# Altium PCB pcb.PCBDOC (part 1 of 4)
Units mil, origin at the board's own origin, x right, y up, seen from the top; angles counter-clockwise.
Board outline 6250 x 3000 mil, 6 copper layers (Top Layer, Internal Plane 1, Mid-Layer 1, Mid-Layer 2, Internal Plane 2, Bottom Layer); 189 components, 357 nets, 1696 pads, 997 vias.
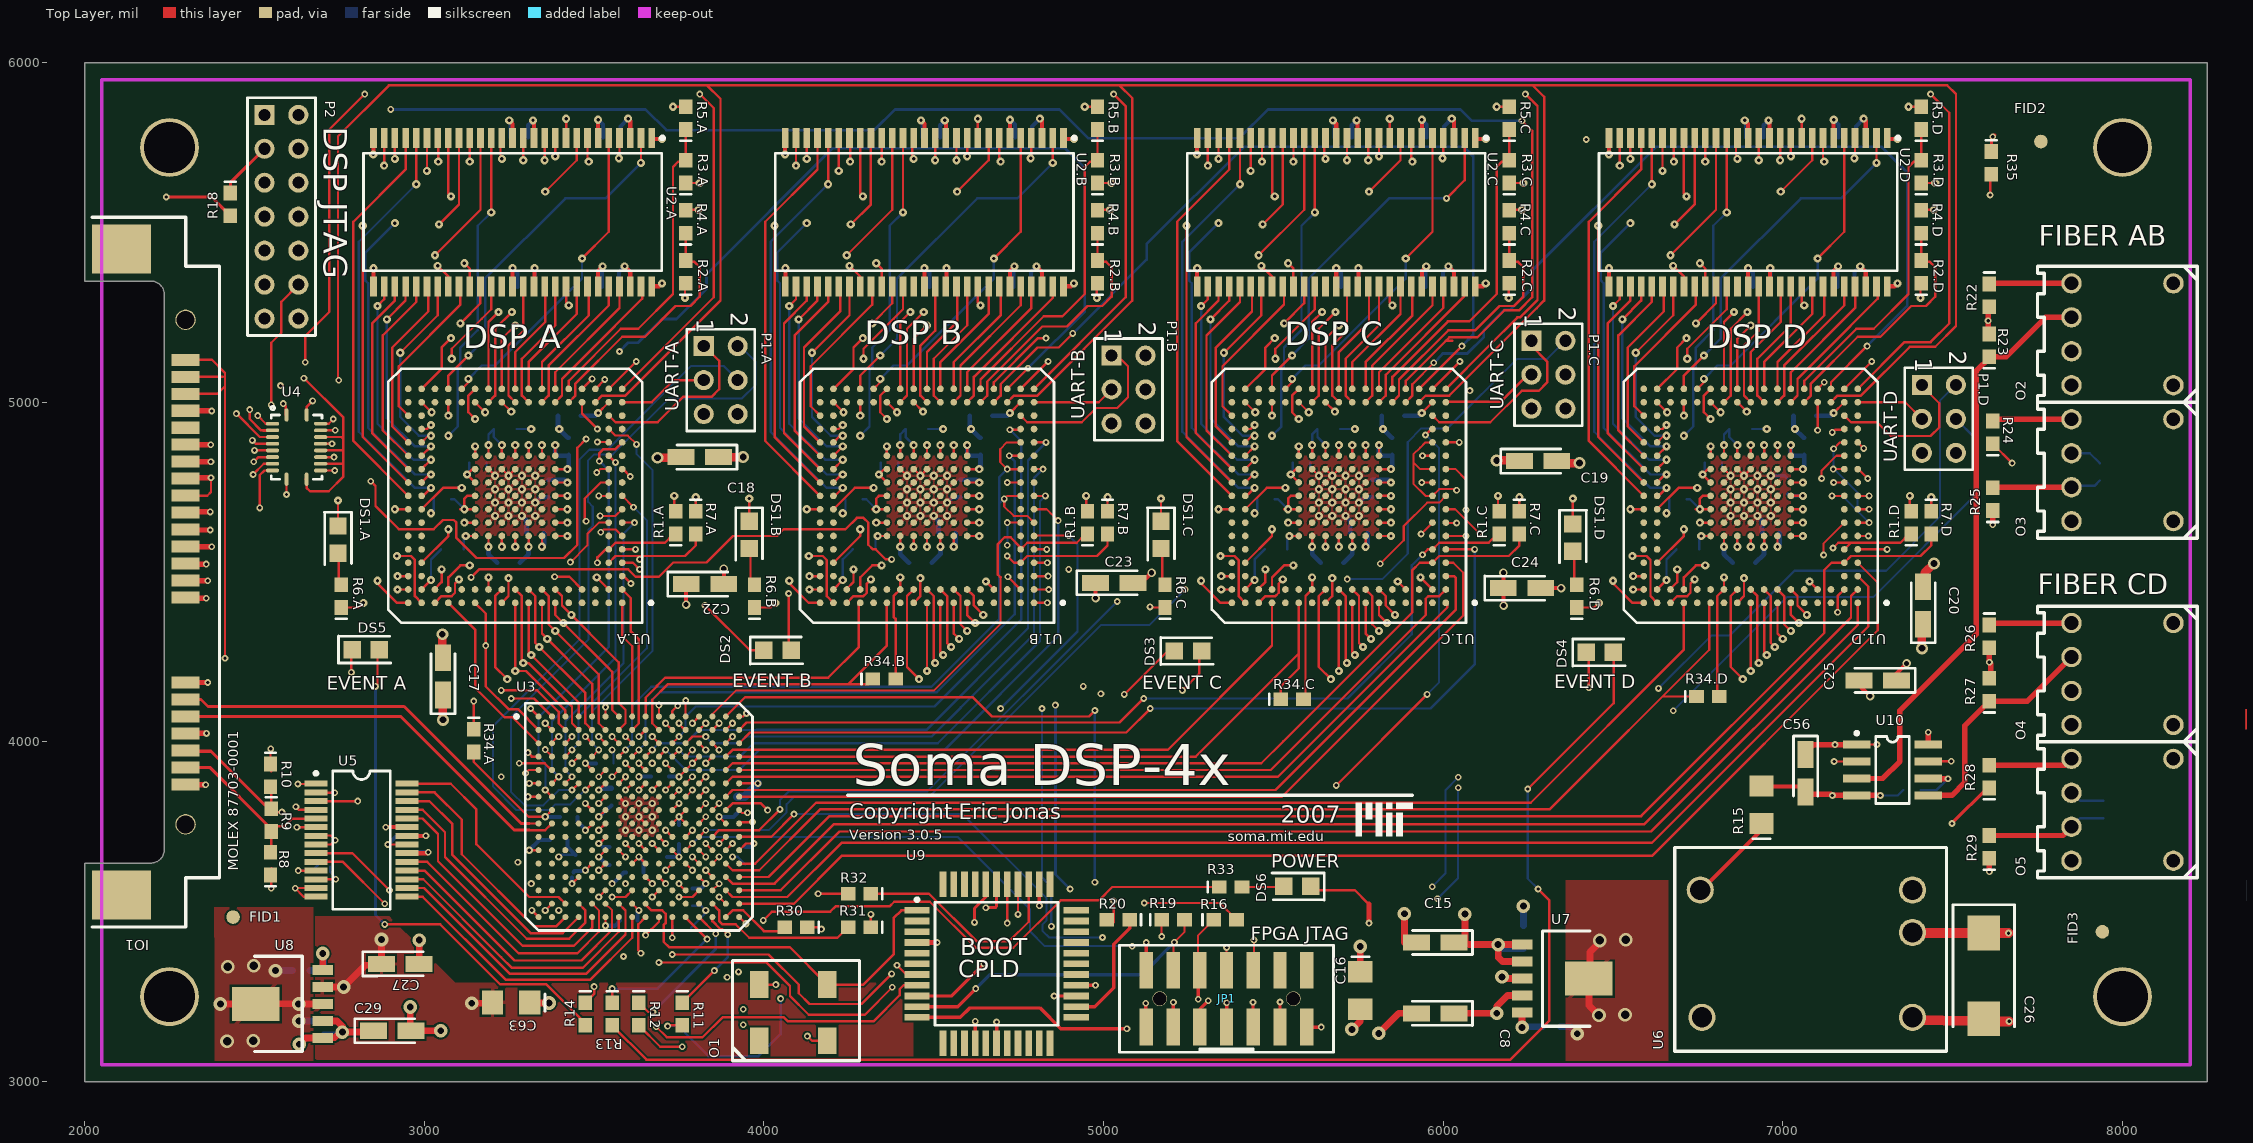
[diagram p0: Top Layer view]
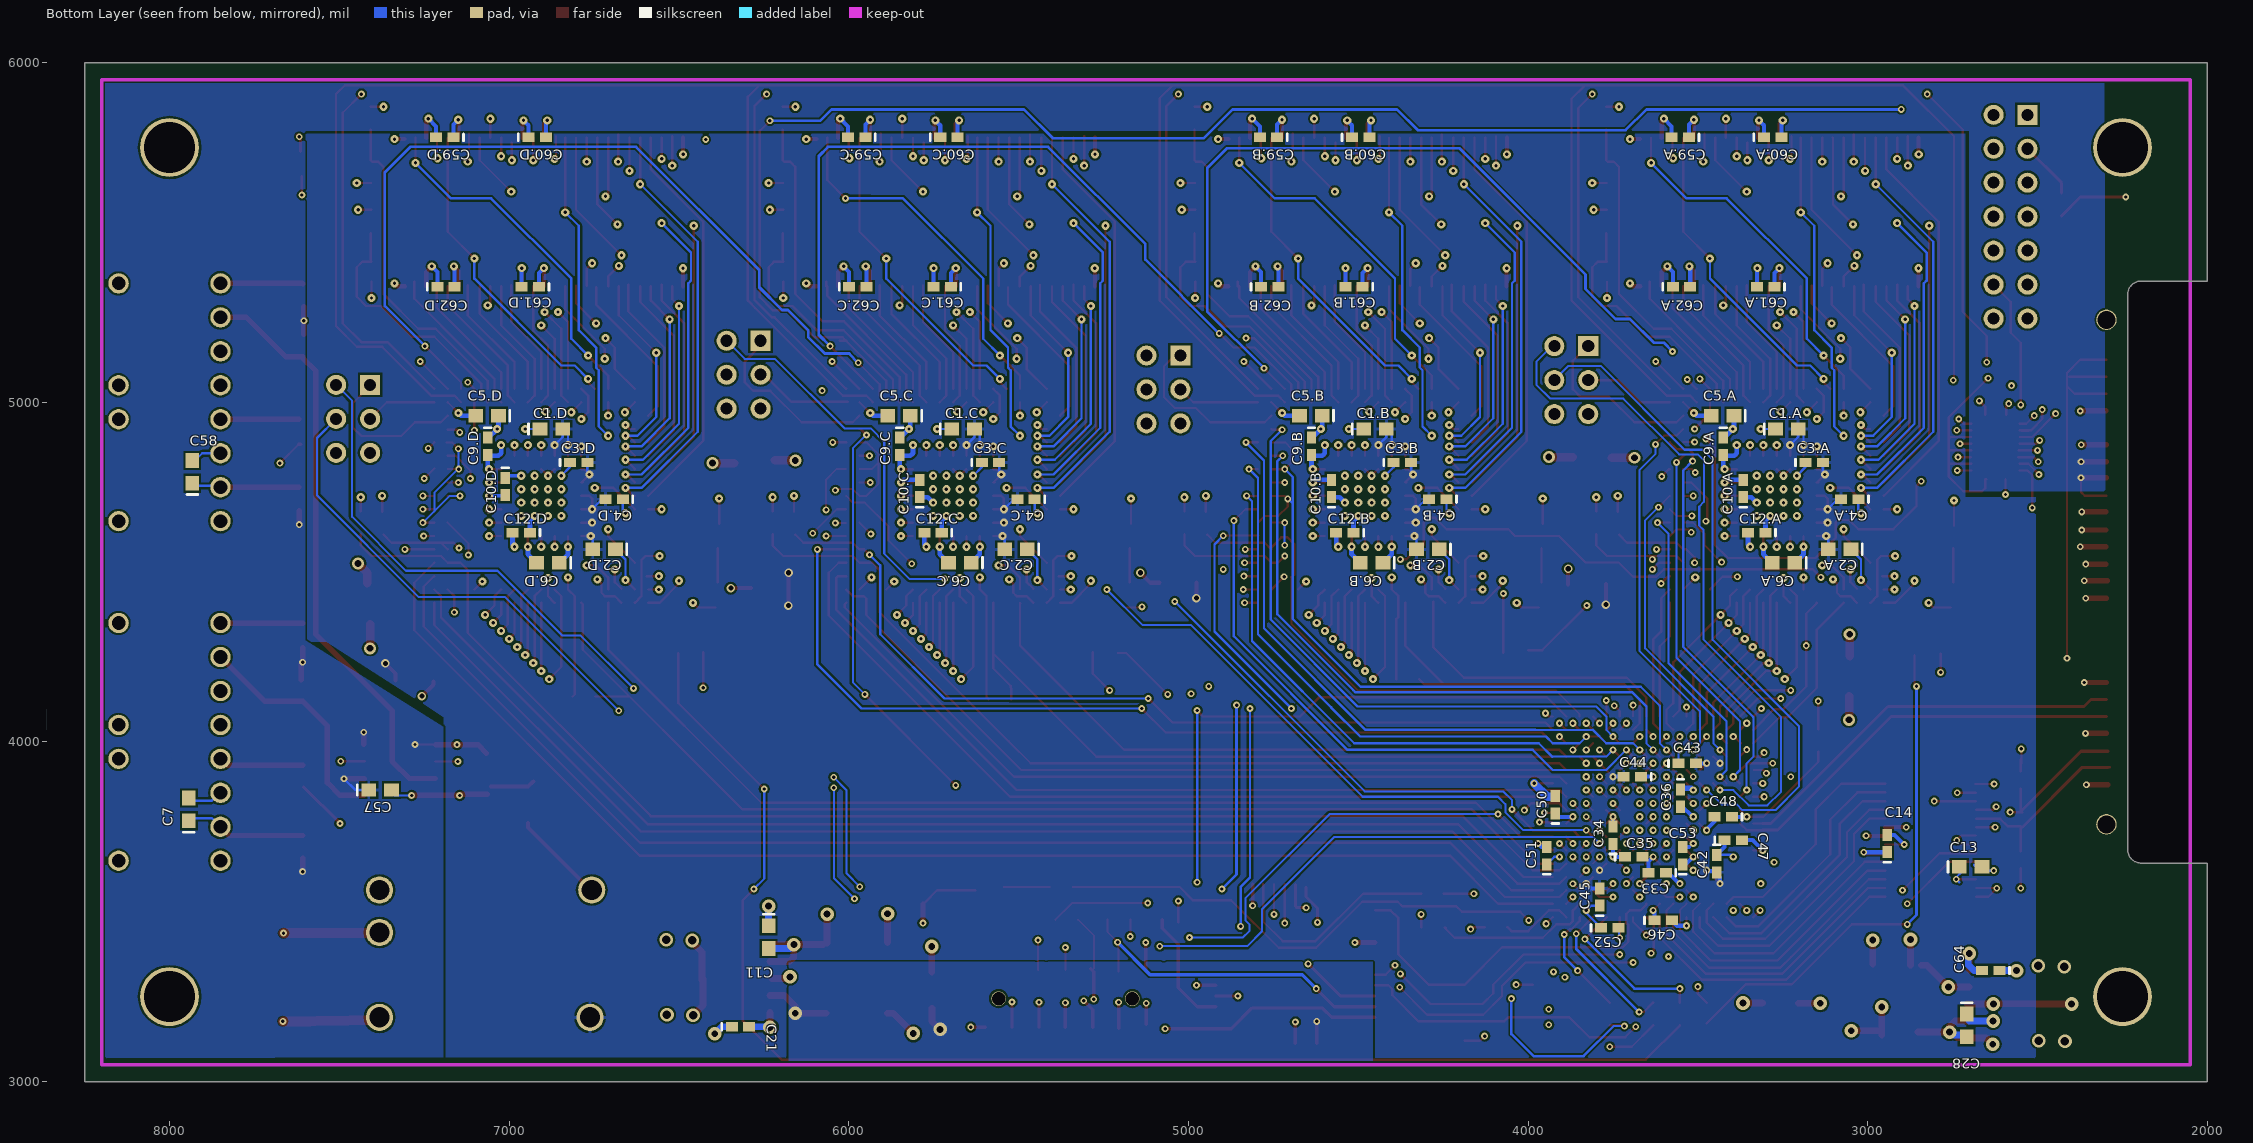
[diagram p1: Bottom Layer view, seen from below]
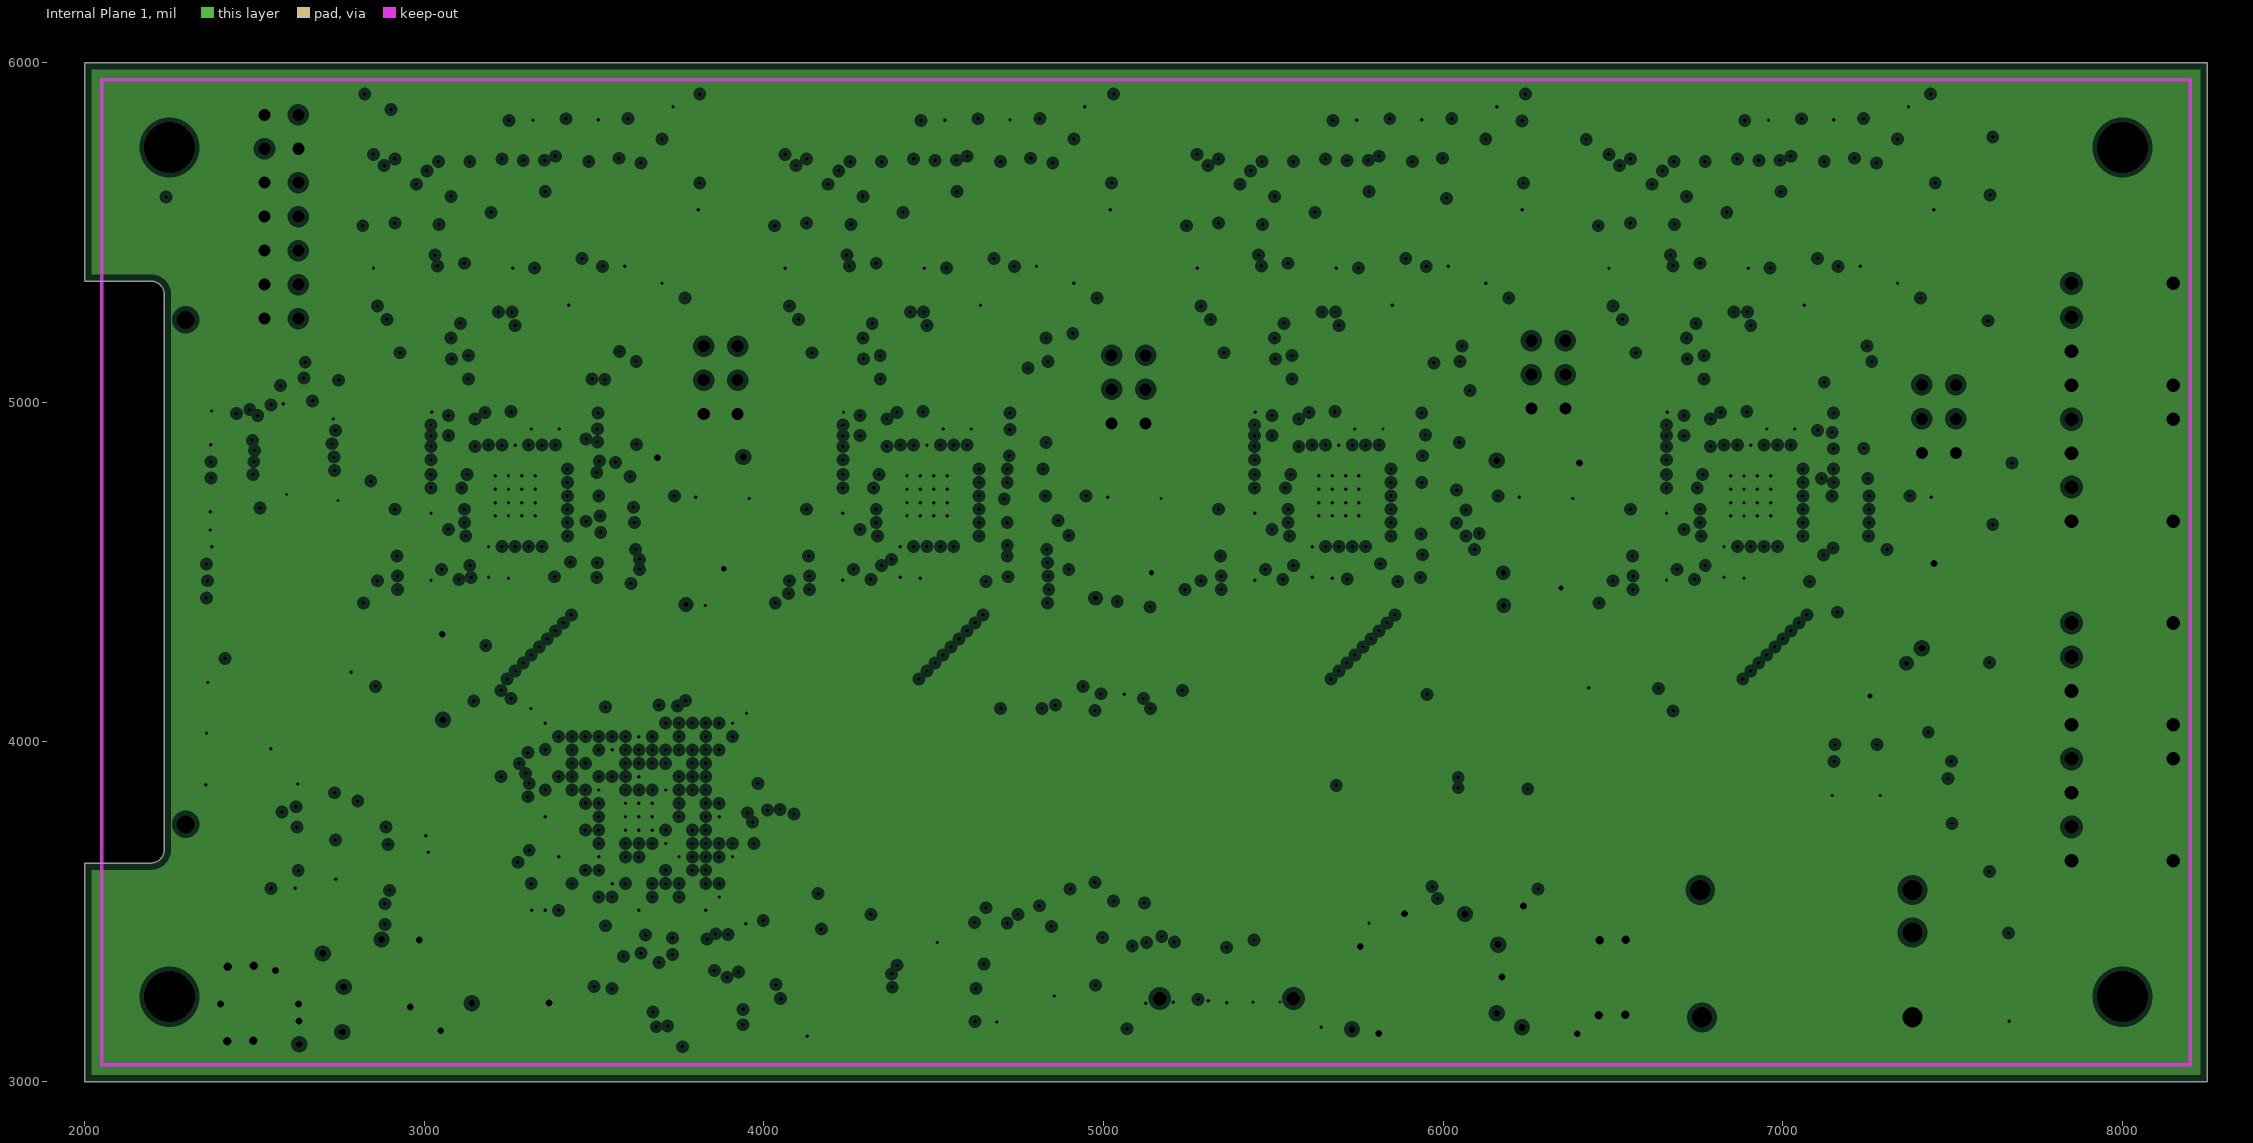
[diagram p2: Internal Plane 1, clearances drawn from the general rule]
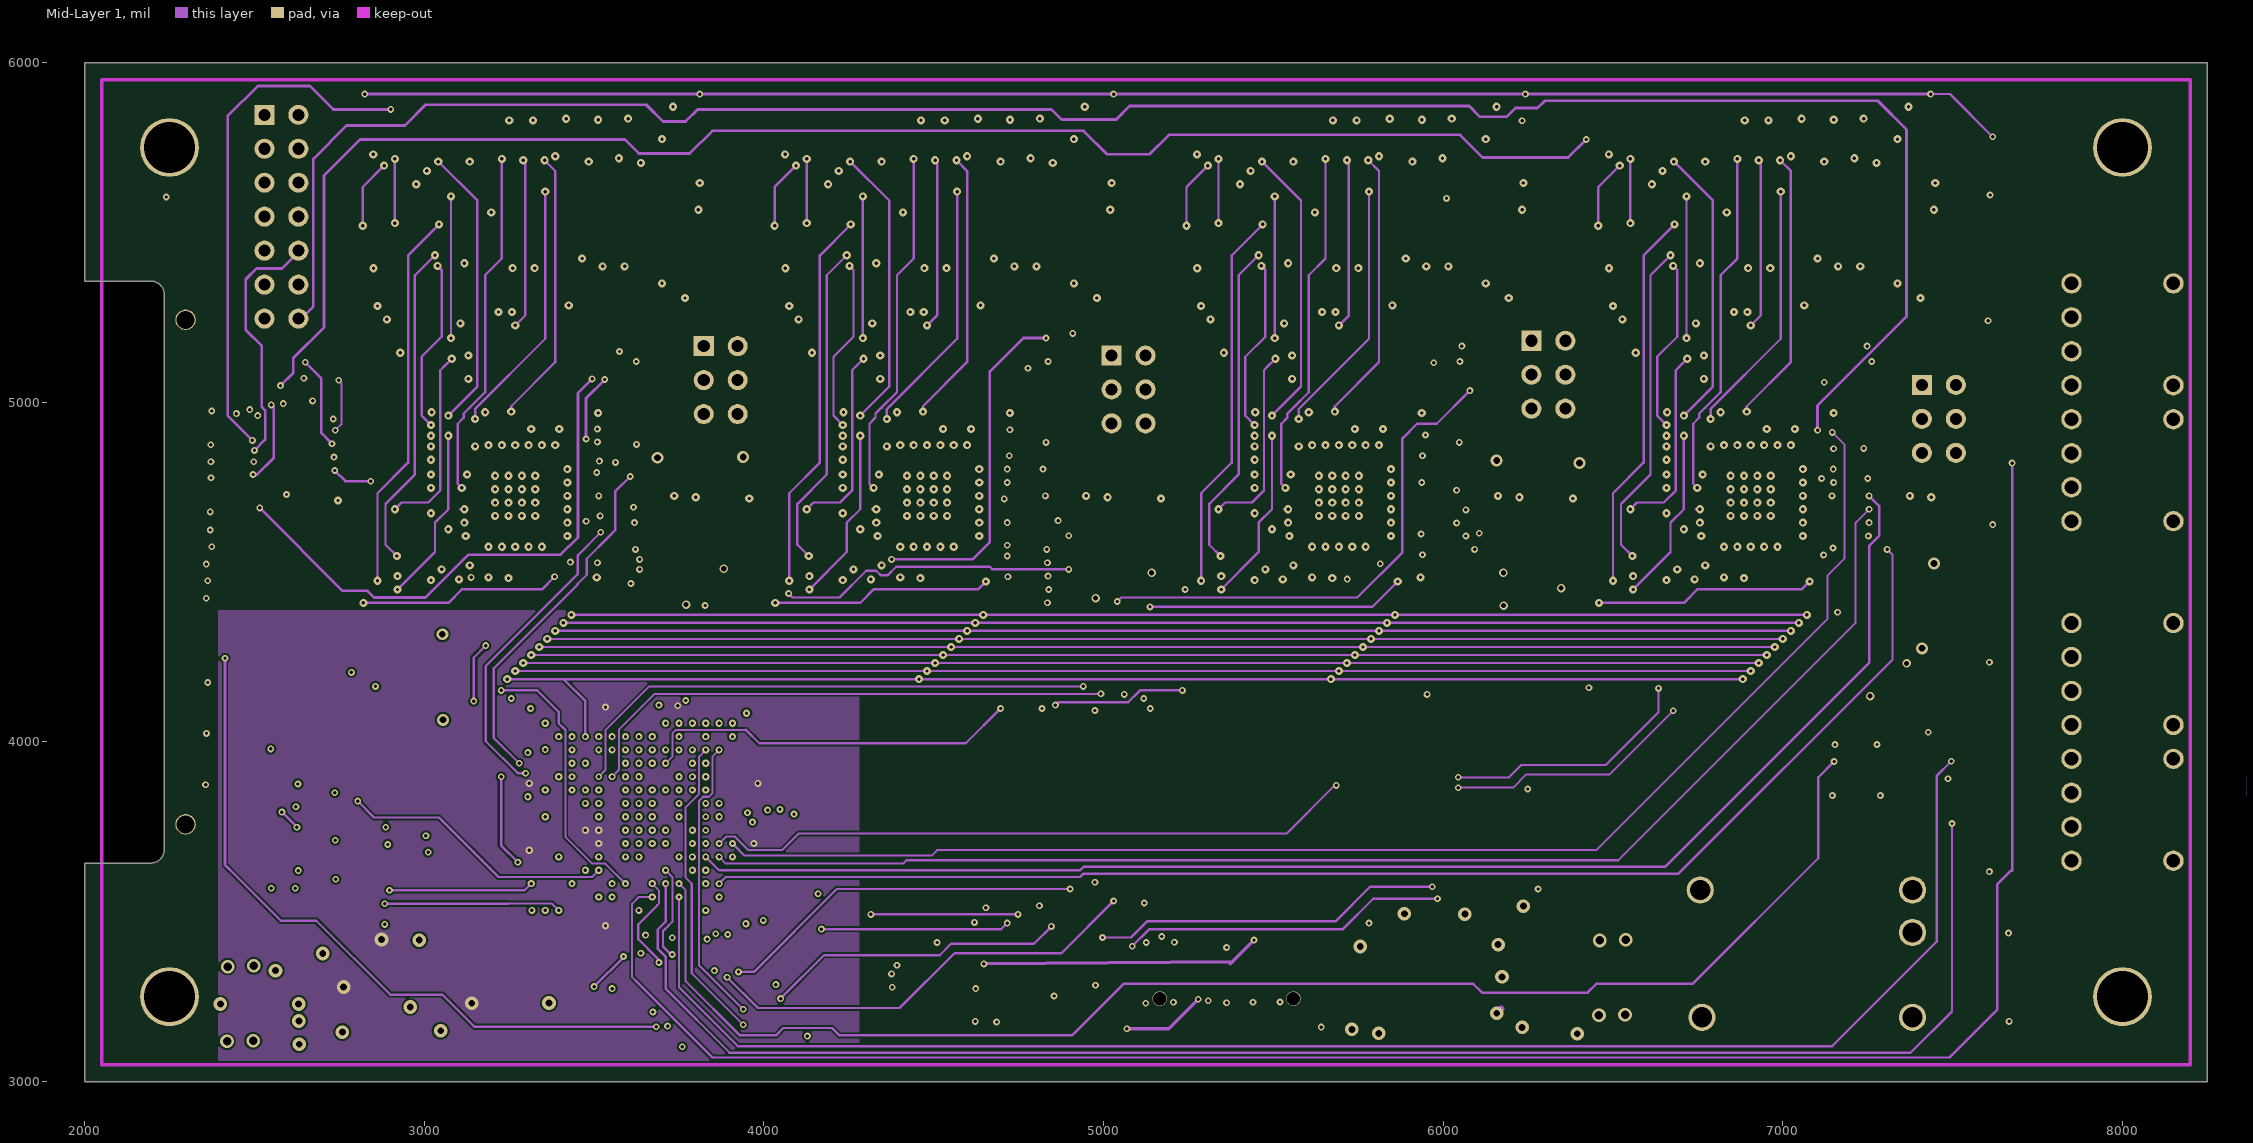
[diagram p3: Mid-Layer 1]
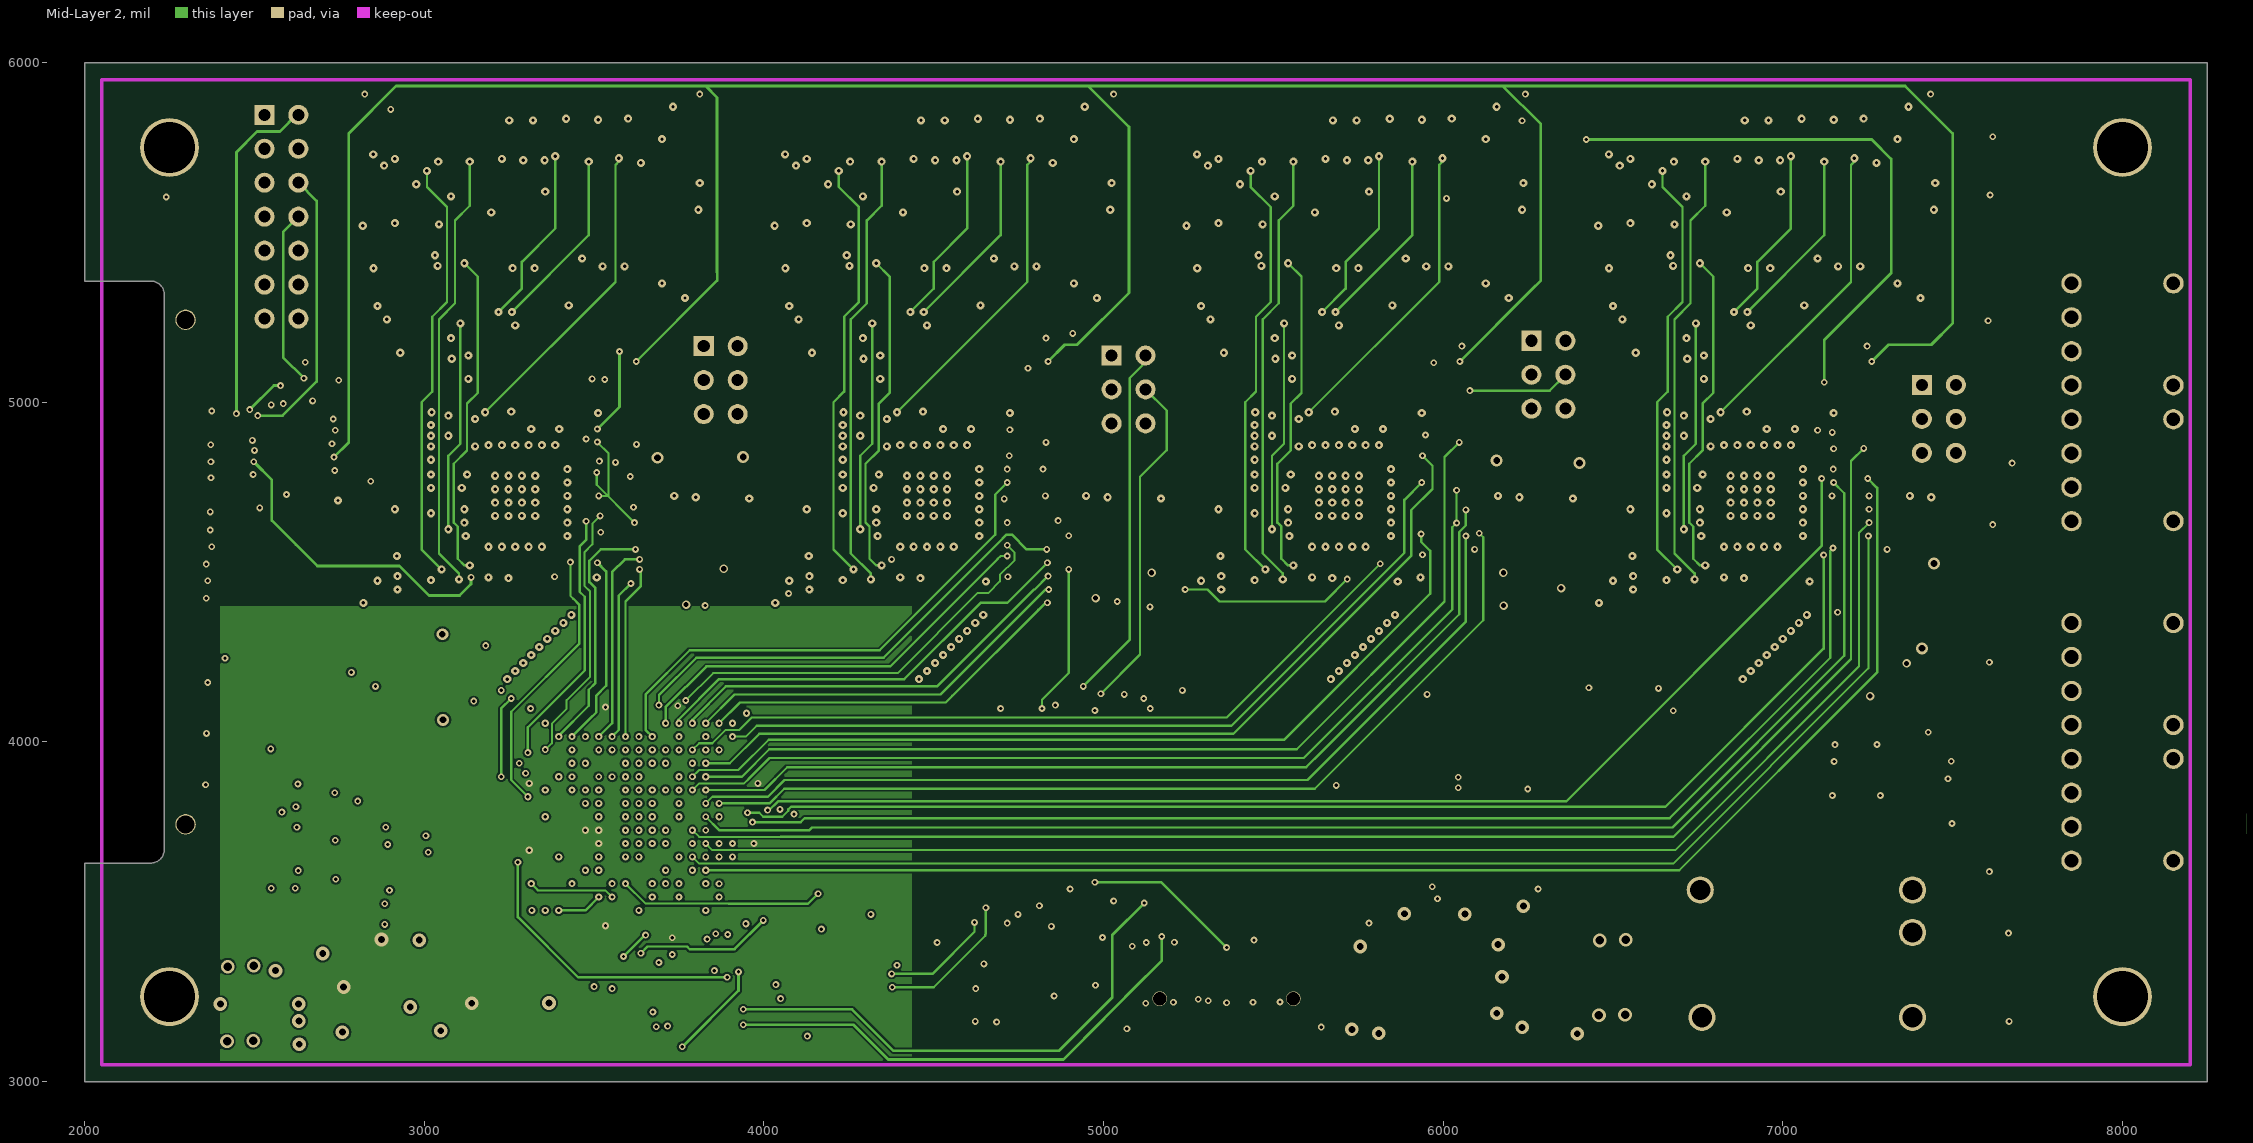
[diagram p4: Mid-Layer 2]
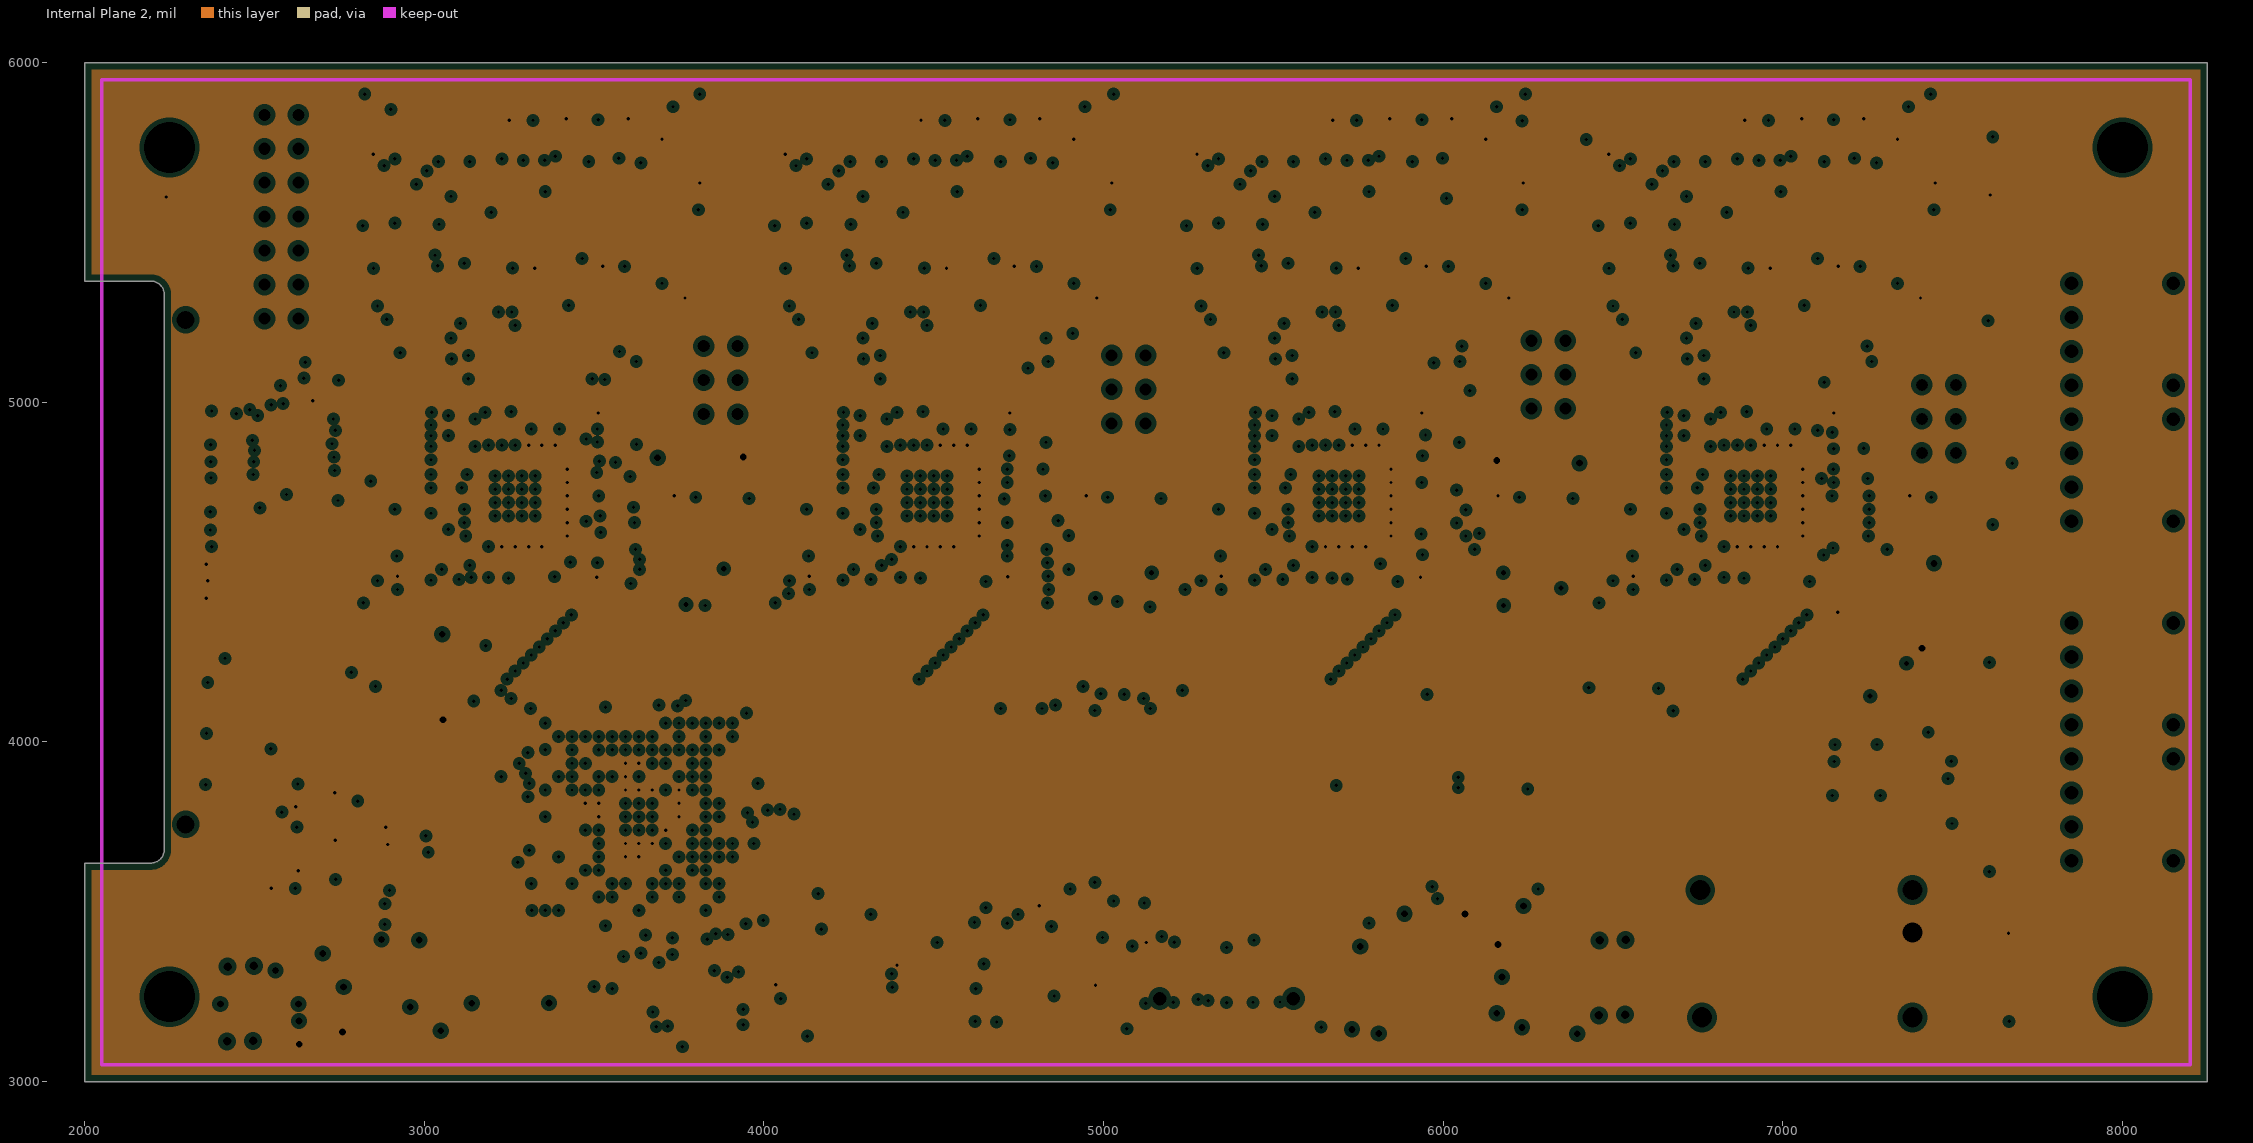
[diagram p5: Internal Plane 2, clearances drawn from the general rule]

## Layer stack, top to bottom
Top Layer: signal copper 1.4
Dielectric: core 12.6, FR-4, Dk 4.8
Internal Plane 1: plane copper 1.4, net GND
Dielectric: prepreg 12.6, FR-4, Dk 4.8
Mid-Layer 1: signal copper 1.4
Dielectric: core 12.6, FR-4, Dk 4.8
Mid-Layer 2: signal copper 1.4
Dielectric: prepreg 12.6, FR-4, Dk 4.8
Internal Plane 2: plane copper 1.4, net VCC
Dielectric: core 12.6, FR-4, Dk 4.8
Bottom Layer: signal copper 1.4

## Board outline
2000,3000 2000,3643.11 2194.88,3643.11 ccw(c2194.88,3682.48) 2234.25,3682.48 2234.25,5317.52 ccw(c2194.88,5317.52) 2194.88,5356.89 2000,5356.89 2000,6000 8250,6000 8250,3000

## Design rules (kind name [scope] priority, off if disabled: settings)
Clearance [All] p1: gap=6
ComponentClearance [All] p1: gap=10 collisioncheckmode=3 verticalgap=10
HoleSize [All] p1: absolutevalues=TRUE maxlimit=200 minlimit=1 maxpercent=80.000 minpercent=20.000
PlaneClearance [All] p1: clearance=14
PlaneConnect DSPGND_interface [(InNet('GND') AND (InComponentClass('A') OR InComponentClass('B') OR InComponentClass('C') OR
InComponentClass('D') ))] p1: planeconnectstyle=Relief reliefexpansion=15 reliefentries=4 reliefconductorwidth=15 reliefairgap=7
PlaneConnect [All] p2: planeconnectstyle=Relief reliefexpansion=14 reliefentries=4 reliefconductorwidth=10 reliefairgap=7
PolygonConnect [InNet('GND')] p1: connectstyle=Relief reliefconductorwidth=10 reliefentries=2 polygonreliefangle="45 Angle"
PolygonConnect PolygonConnect_1 [All] p2: connectstyle=Relief reliefconductorwidth=10 reliefentries=4 polygonreliefangle="90 Angle"
RoomDefinition main [InComponentClass('main')] p1: confinementstyle=ConfineIn formatcopy=TRUE lockcomponents=FALSE outline 8249.98,3076.77 7501.97,3076.77 7501.97,3342.51 8249.98,3342.51
RoomDefinition FIBER [InComponentClass('FIBER')] p2: confinementstyle=ConfineIn formatcopy=TRUE lockcomponents=FALSE outline 8249.98,5484.25 7547.24,5484.25 7547.24,3507.87 8249.98,3507.87
RoomDefinition D [InComponentClass('D')] p3: confinementstyle=ConfineIn formatcopy=TRUE lockcomponents=FALSE outline 6303.15,5897.64 7515.75,5897.64 7515.75,4169.29 6303.15,4169.29
RoomDefinition C [InComponentClass('C')] p4: confinementstyle=ConfineIn formatcopy=TRUE lockcomponents=FALSE outline 5090.55,5897.64 6303.15,5897.64 6303.15,4169.29 5090.55,4169.29
RoomDefinition B [InComponentClass('B')] p5: confinementstyle=ConfineIn formatcopy=TRUE lockcomponents=FALSE outline 3877.95,5897.64 5090.55,5897.64 5090.55,4169.29 3877.95,4169.29
RoomDefinition A [InComponentClass('A')] p6: confinementstyle=ConfineIn formatcopy=TRUE lockcomponents=FALSE outline 2665.35,5897.64 3877.95,5897.64 3877.95,4169.29 2665.35,4169.29
RoomDefinition FPGA [InComponentClass('FPGA')] p7: confinementstyle=ConfineIn formatcopy=TRUE lockcomponents=FALSE outline 8250,3005 3078.74,3005 3078.74,4010 8250,4010
RoomDefinition IO [InComponentClass('IO')] p8: confinementstyle=ConfineIn formatcopy=TRUE lockcomponents=FALSE outline 8250,3960 2340.55,3960 2340.55,3051.18 8250,3051.18
RoomDefinition PC [InComponentClass('PC')] p9: confinementstyle=ConfineIn formatcopy=TRUE lockcomponents=FALSE outline 4322.83,3023.62 7667.32,3023.62 7667.32,3824.8 4322.83,3824.8
RoutingVias [All] p1: holewidth=10 width=20 viastyle="Through Hole" minholewidth=10 minwidth=20 maxholewidth=28 maxwidth=50
SolderMaskExpansion [All] p1: expansion=4
TestPointUsage [All] p1: valid=0 allowmultiple=FALSE
Testpoint [All] p1: side=15 testpointundercomponent=TRUE minsize=40 maxsize=100 preferedsize=60 minholesize=0 maxholesize=40 preferedholesize=32 testpointgrid=1 style=1023 order=0-112345678
Width [All] p1: maxlimit=50 minlimit=6 preferedwidth=8 toplayer_prefwidth=7 midlayer1_prefwidth=7 midlayer2_prefwidth=7 bottomlayer_prefwidth=6 minimp=50.000000 maximp=50.000000 favimp=50.000000
14 further rules are at their usual default settings.

## Classes and differential pairs
component class FIBER: C7 C56 C57 C58 O2 O3 O4 O5 R22 R23 R24 R25 R26 R27 R28 R29 U10
component class B: C1.B C2.B C3.B C4.B C5.B C6.B C9.B C10.B C12.B C59.B C60.B C61.B C62.B DS1.B P1.B R1.B R2.B R3.B R4.B R5.B R6.B R7.B R34.B U1.B U2.B
component class D: C1.D C2.D C3.D C4.D C5.D C6.D C9.D C10.D C12.D C59.D C60.D C61.D C62.D DS1.D P1.D R1.D R2.D R3.D R4.D R5.D R6.D R7.D R34.D U1.D U2.D
component class C: C1.C C2.C C3.C C4.C C5.C C6.C C9.C C10.C C12.C C59.C C60.C C61.C C62.C DS1.C P1.C R1.C R2.C R3.C R4.C R5.C R6.C R7.C R34.C U1.C U2.C
component class A: C1.A C2.A C3.A C4.A C5.A C6.A C7.DSPA C8.DSPA C9.A C10.A C11.DSPA C12.A C59.A C60.A C61.A C62.A DS1.A P1.A R1.A R2.A R3.A R4.A R5.A R6.A R7.A R34.A U1.A U2.A
component class FPGA: P2 R18 R35 U4
net class PPI[0..7]: PPI0 PPI1 PPI2 PPI3 PPI4 PPI5 PPI6 PPI7
channel class DSP: A B C D
component class IO: C13 C14 DS2 DS3 DS4 DS5 DS6 IO1 R8 R9 R10 R11 R12 R13 R14 R33 U5
component class PC: C8 C11 C15 C16 C17 C18 C19 C20 C21 C22 C23 C24 C25 C26 C27 C28 C29 C30 C31 C32 C33 C34 C35 C36 C37 C38 C39 C40 C41 C42 C43 C44 C45 C46 C47 C48 C49 C50 C51 C52 C53 C54 C55 C63 C64 JP1 O1 R15 R16 R17 R19 R20 R30 R31 R32 U3 U6 U7 U8 U9
component class main: FID1 FID2 FID3

## Components (designator, comment, footprint, x,y, rotation, side; value= is the part's Value field where it differs from the comment)
C1.A "CAPACITOR" 0603 3238.19,4921.26 r180 bottom (schematic designator C1)
C1.B "CAPACITOR" 0603 4450.79,4921.26 r180 bottom (schematic designator C1)
C1.C "CAPACITOR" 0603 5663.39,4921.26 r180 bottom (schematic designator C1)
C1.D "CAPACITOR" 0603 6875.98,4921.26 r180 bottom (schematic designator C1)
C2.A "CAPACITOR" 0603 3082.61,4566.93 r0 bottom (schematic designator C2)
C2.B "CAPACITOR" 0603 4295.21,4566.93 r0 bottom (schematic designator C2)
C2.C "CAPACITOR" 0603 5507.81,4566.93 r0 bottom (schematic designator C2)
C2.D "CAPACITOR" 0603 6720.41,4566.93 r0 bottom (schematic designator C2)
C3.A "CAPACITOR" 0402 3157.54,4822.83 r180 bottom (schematic designator C3)
C3.B "CAPACITOR" 0402 4370.14,4822.83 r180 bottom (schematic designator C3)
C3.C "CAPACITOR" 0402 5582.74,4822.83 r180 bottom (schematic designator C3)
C3.D "CAPACITOR" 0402 6795.34,4822.83 r180 bottom (schematic designator C3)
C4.A "CAPACITOR" 0402 3053.09,4714.57 r0 bottom (schematic designator C4)
C4.B "CAPACITOR" 0402 4265.69,4714.57 r0 bottom (schematic designator C4)
C4.C "CAPACITOR" 0402 5478.28,4714.57 r0 bottom (schematic designator C4)
C4.D "CAPACITOR" 0402 6690.88,4714.57 r0 bottom (schematic designator C4)
C5.A "CAPACITOR" 0603 3427.1,4960.63 r0 bottom (schematic designator C5)
C5.B "CAPACITOR" 0603 4639.7,4960.63 r0 bottom (schematic designator C5)
C5.C "CAPACITOR" 0603 5852.3,4960.63 r0 bottom (schematic designator C5)
C5.D "CAPACITOR" 0603 7064.9,4960.63 r0 bottom (schematic designator C5)
C6.A "CAPACITOR" 0603 3248.03,4527.56 r0 bottom (schematic designator C6)
C6.B "CAPACITOR" 0603 4460.63,4527.56 r0 bottom (schematic designator C6)
C6.C "CAPACITOR" 0603 5673.23,4527.56 r0 bottom (schematic designator C6)
C6.D "CAPACITOR" 0603 6885.83,4527.56 r0 bottom (schematic designator C6)
C7 "CAPACITOR" 0603 7942.91,3801.12 r90 bottom
C8 "POLCAP" 3216 5976.38,3200.79 r180 top
C9.A "CAPACITOR" 0402 3425.2,4870.14 r270 bottom (schematic designator C9)
C9.B "CAPACITOR" 0402 4637.8,4870.14 r270 bottom (schematic designator C9)
C9.C "CAPACITOR" 0402 5850.39,4870.14 r270 bottom (schematic designator C9)
C9.D "CAPACITOR" 0402 7062.99,4870.14 r270 bottom (schematic designator C9)
C10.A "CAPACITOR" 0402 3366.14,4746 r90 bottom (schematic designator C10)
C10.B "CAPACITOR" 0402 4578.74,4746 r90 bottom (schematic designator C10)
C10.C "CAPACITOR" 0402 5791.34,4746 r90 bottom (schematic designator C10)
C10.D "CAPACITOR" 0402 7011.81,4751.97 r270 bottom (schematic designator C10)
C11 "CAPACITOR" 0603 6236.22,3425.2 r270 bottom
C12.A "CAPACITOR" 0402 3326.77,4616.14 r0 bottom (schematic designator C12)
C12.B "CAPACITOR" 0402 4539.37,4616.14 r0 bottom (schematic designator C12)
C12.C "CAPACITOR" 0402 5751.97,4616.14 r0 bottom (schematic designator C12)
C12.D "CAPACITOR" 0402 6964.57,4616.14 r0 bottom (schematic designator C12)
C13 "CAPACITOR" 0603 2696.85,3631.89 r180 bottom
C14 "CAPACITOR" 0402 2942.91,3700.79 r90 bottom
C15 "POLCAP" 3216 5976.38,3409.45 r180 top
C16 "Cap" 1206 5755.91,3267.72 r270 top
C17 "Bypass Cap" 3216 3055.12,4192.91 r90 top
C18 "Bypass Cap" 3216 3811.02,4838.58 r180 top
C19 "Bypass Cap" 3216 6279.53,4826.77 r0 top
C20 "Bypass Cap" 3216 7413.39,4401.57 r90 top
C21 "CAPACITOR" 0402 6318.9,3161.42 r180 bottom
C22 "Bypass Cap" 3216 3826.77,4464.57 r0 top
C23 "Bypass Cap" 3216 5031.5,4468.5 r0 top
C24 "Bypass Cap" 3216 6232.28,4452.76 r0 top
C25 "Bypass Cap" 3216 7279.53,4181.1 r180 top
C26 "A700D107M006AT" 7343 7591.54,3311.02 r270 top
C27 "POLCAP" 3216 2929.13,3346.46 r0 top
C28 "CAPACITOR" 0603 2708.66,3165.35 r270 bottom
C29 "POLCAP" 3216 2905.51,3149.61 r0 top
C33 "CAPACITOR" 0402 3620,3615 r0 bottom
C34 "CAPACITOR" 0402 3750,3725 r90 bottom
C35 "CAPACITOR" 0402 3688.98,3661.42 r180 bottom
C36 "CAPACITOR" 0402 3551.18,3834.65 r270 bottom
C42 "CAPACITOR" 0402 3444.88,3641.73 r270 bottom
C43 "CAPACITOR" 0402 3531.5,3937.01 r180 bottom
C44 "CAPACITOR" 0402 3692.91,3897.64 r0 bottom
C45 "CAPACITOR" 0402 3789.37,3543.31 r90 bottom
C46 "CAPACITOR" 0402 3602.36,3474.41 r180 bottom
C47 "CAPACITOR" 0402 3395.67,3710.63 r180 bottom
C48 "CAPACITOR" 0402 3425.2,3779.53 r0 bottom
C50 "CAPACITOR" 0402 3920,3815 r90 bottom
C51 "CAPACITOR" 0402 3945,3665 r90 bottom
C52 "CAPACITOR" 0402 3759.84,3452.76 r180 bottom
C53 "CAPACITOR" 0402 3545,3665 r90 bottom
C56 "Bypass Cap" 3216 7066.93,3907.48 r270 top
C57 "CAPACITOR" 0603 7379.98,3858.27 r180 bottom
C58 "CAPACITOR" 0603 7933.07,4795.21 r90 bottom
C59.A "CAPACITOR" 0402 3551.75,5780 r0 bottom (schematic designator C59)
C59.B "CAPACITOR" 0402 4764.35,5780 r0 bottom (schematic designator C59)
C59.C "CAPACITOR" 0402 5976.95,5780 r0 bottom (schematic designator C59)
C59.D "CAPACITOR" 0402 7189.54,5780 r0 bottom (schematic designator C59)
C60.A "CAPACITOR" 0402 3280,5780 r180 bottom (schematic designator C60)
C60.B "CAPACITOR" 0402 4492.6,5780 r180 bottom (schematic designator C60)
C60.C "CAPACITOR" 0402 5705.2,5780 r180 bottom (schematic designator C60)
C60.D "CAPACITOR" 0402 6917.8,5780 r180 bottom (schematic designator C60)
C61.A "CAPACITOR" 0402 3300,5340 r0 bottom (schematic designator C61)
C61.B "CAPACITOR" 0402 4512.6,5340 r0 bottom (schematic designator C61)
C61.C "CAPACITOR" 0402 5725.2,5340 r0 bottom (schematic designator C61)
C61.D "CAPACITOR" 0402 6937.8,5340 r0 bottom (schematic designator C61)
C62.A "CAPACITOR" 0402 3548.25,5340 r180 bottom (schematic designator C62)
C62.B "CAPACITOR" 0402 4760.85,5340 r180 bottom (schematic designator C62)
C62.C "CAPACITOR" 0402 5973.45,5340 r180 bottom (schematic designator C62)
C62.D "CAPACITOR" 0402 7186.05,5340 r180 bottom (schematic designator C62)
C63 "Cap" 1206 3255.91,3232.28 r180 top
C64 "CAPACITOR" 0402 2637.73,3326.77 r0 bottom
DS1.A "LED3" LED0805 2746.06,4635.83 r270 top (schematic designator DS1)
DS1.B "LED3" LED0805 3956.69,4649.61 r270 top (schematic designator DS1)
DS1.C "LED3" LED0805 5169.29,4649.61 r270 top (schematic designator DS1)
DS1.D "LED3" LED0805 6381.89,4641.73 r270 top (schematic designator DS1)
DS2 "LED3" LED0805 4000,4269.69 r0 top
DS3 "LED3" LED0805 5208.66,4267.72 r0 top
DS4 "LED3" LED0805 6421.26,4263.78 r0 top
DS5 "LED3" LED0805 2787.4,4271.65 r0 top
DS6 "LED3" LED0805 5610.24,3574.8 r180 top
FID1 "*" FIDUCIAL 2437.01,3484.25 r90 top
FID2 "*" FIDUCIAL 7759.84,5767.72 r90 top
FID3 "*" FIDUCIAL 7940.94,3440.94 r90 top
IO1 "SATA 23-pin header" "MOLEX 87703-0001" 2297.24,4500 r270 top locked
JP1 "Header 7X2" "SMT 2x7 2mm HDR" 5362.2,3244.09 r180 top
O1 "OSC2" ECS-3953M 3986.22,3120.08 r0 top
O2 "HFBR-1528" HPVL 7850,5200 r90 top locked
O3 "HFBR-2528" HPVL 7850,4800 r90 top locked
O4 "HFBR-1528" HPVL 7850,4200 r90 top
O5 "HFBR-2528" HPVL 7850,3800 r90 top
P1.A "Header 3X2" HDR2X3 3822.83,5165.35 r270 top (schematic designator P1)
P1.B "Header 3X2" HDR2X3 5023.62,5137.8 r270 top (schematic designator P1)
P1.C "Header 3X2" HDR2X3 6259.84,5181.1 r270 top (schematic designator P1)
P1.D "Header 3X2" HDR2X3 7409.45,5051.18 r270 top (schematic designator P1)
P2 "Header 7X2" HDR2X7 2529.53,5846.46 r270 top
R1.A "RESISTOR" 0603 3740.16,4645.67 r90 top (schematic designator R1)
R1.B "RESISTOR" 0603 4952.76,4645.67 r90 top (schematic designator R1)
R1.C "RESISTOR" 0603 6165.35,4645.67 r90 top (schematic designator R1)
R1.D "RESISTOR" 0603 7377.95,4645.67 r90 top (schematic designator R1)
R2.A "RESISTOR" 0603 3769.68,5383.86 r90 top (schematic designator R2)
R2.B "RESISTOR" 0603 4982.28,5383.86 r90 top (schematic designator R2)
R2.C "RESISTOR" 0603 6194.88,5383.86 r90 top (schematic designator R2)
R2.D "RESISTOR" 0603 7407.48,5383.86 r90 top (schematic designator R2)
R3.A "RESISTOR" 0603 3769.68,5679.13 r90 top (schematic designator R3)
R3.B "RESISTOR" 0603 4982.28,5679.13 r90 top (schematic designator R3)
R3.C "RESISTOR" 0603 6194.88,5679.13 r90 top (schematic designator R3)
R3.D "RESISTOR" 0603 7407.48,5679.13 r90 top (schematic designator R3)
R4.A "RESISTOR" 0603 3769.68,5531.5 r90 top (schematic designator R4)
R4.B "RESISTOR" 0603 4982.28,5531.5 r90 top (schematic designator R4)
R4.C "RESISTOR" 0603 6194.88,5531.5 r90 top (schematic designator R4)
R4.D "RESISTOR" 0603 7407.48,5531.5 r90 top (schematic designator R4)
R5.A "RESISTOR" 0603 3769.68,5836.61 r90 top (schematic designator R5)
R5.B "RESISTOR" 0603 4982.28,5836.61 r90 top (schematic designator R5)
R5.C "RESISTOR" 0603 6194.88,5836.61 r90 top (schematic designator R5)
R5.D "RESISTOR" 0603 7407.48,5836.61 r90 top (schematic designator R5)
R6.A "RESISTOR" 0603 2755.91,4429.13 r90 top (schematic designator R6)
R6.B "RESISTOR" 0603 3972.44,4429.13 r90 top (schematic designator R6)
R6.C "RESISTOR" 0603 5181.1,4429.13 r90 top (schematic designator R6)
R6.D "RESISTOR" 0603 6393.7,4429.13 r90 top (schematic designator R6)
R7.A "RESISTOR" 0603 3799.21,4645.67 r270 top (schematic designator R7)
R7.B "RESISTOR" 0603 5011.81,4645.67 r270 top (schematic designator R7)
R7.C "RESISTOR" 0603 6224.41,4645.67 r270 top (schematic designator R7)
R7.D "RESISTOR" 0603 7437.01,4645.67 r270 top (schematic designator R7)
R8 "100" 0603 2547.24,3641.73 r90 top
R9 "100" 0603 2549.21,3769.68 r270 top
R10 "100" 0603 2547.24,3901.57 r270 top
R11 "RESISTOR" 0603 3759.84,3198.82 r270 top
R12 "RESISTOR" 0603 3631.89,3198.82 r270 top
R13 "RESISTOR" 0603 3553.15,3198.82 r270 top
R14 "RESISTOR" 0603 3474.41,3198.82 r270 top
R15 "RESISTOR" 1206 6937.01,3814.96 r90 top
R16 "current-limiting series res" 0603 5358.27,3476.38 r0 top
R18 "RESISTOR" 0603 2429.13,5582.68 r270 top
R19 "current-limiting series res" 0603 5204.72,3476.38 r0 top
R20 "current-limiting series res" 0603 5043.31,3476.38 r180 top
R22 "RESISTOR" 0603 7608.27,5314.96 r270 top
R23 "RESISTOR" 0603 7608.27,5167.32 r90 top
R24 "RESISTOR" 0603 7618.11,4911.42 r90 top
R25 "RESISTOR" 0603 7618.11,4714.57 r90 top
R26 "RESISTOR" 0603 7608.27,4311.02 r270 top
R27 "RESISTOR" 0603 7608.27,4153.54 r90 top
R28 "RESISTOR" 0603 7608.27,3897.64 r90 top
R29 "RESISTOR" 0603 7608.27,3690.94 r90 top
R30 "current-limiting series res" 0603 4094.49,3454.72 r180 top
R31 "current-limiting series res" 0603 4281.5,3454.72 r180 top
R32 "current-limiting series res" 0603 4281.5,3553.15 r180 top
R33 "RESISTOR" 0603 5374.02,3572.83 r0 top
R34.A "RESISTOR" 0603 3145.67,4003.94 r270 top (schematic designator R34)
R34.B "RESISTOR" 0603 4354.33,4185.04 r0 top (schematic designator R34)
R34.C "RESISTOR" 0603 5555.12,4125.98 r0 top (schematic designator R34)
R34.D "RESISTOR" 0603 6779.53,4133.86 r0 top (schematic designator R34)
R35 "RESISTOR" 0603 7614.17,5704.72 r270 top
U1.A "Blackfin BF533-PGBA169" "AD PBGA-169" 3267.72,4724.41 r180 top locked (schematic designator U1)
U1.B "Blackfin BF533-PGBA169" "AD PBGA-169" 4480.31,4724.41 r180 top (schematic designator U1)
U1.C "Blackfin BF533-PGBA169" "AD PBGA-169" 5692.91,4724.41 r180 top (schematic designator U1)
U1.D "Blackfin BF533-PGBA169" "AD PBGA-169" 6905.51,4724.41 r180 top locked (schematic designator U1)
U2.A "16Mx16 SDRAM" SO-G54/X.5 3260,5560 r180 top (schematic designator U2)
U2.B "16Mx16 SDRAM" SO-G54/X.5 4472.6,5560 r180 top (schematic designator U2)
U2.C "16Mx16 SDRAM" SO-G54/X.5 5685.2,5560 r180 top (schematic designator U2)
U2.D "16Mx16 SDRAM" SO-G54/X.5 6897.8,5560 r180 top (schematic designator U2)
U3 "Xilinx XC3S200-FT256" "XILINX FT256 BGA" 3631.89,3779.53 r0 top locked
U4 "SN54LVTH244A" RGY 2624.02,4868.11 r270 top
U5 "DS92LV1224" SSO-G28/E4.3 2814.96,3710.63 r270 top
U6 "PTH03000WAH" "TI EUS" 7381.89,3188.98 r180 top
U7 "TPS79518" SOT223-5/Simple 6232.28,3303.15 r270 top
U8 "TPS79525" SOT223-5/Simple 2700.79,3228.35 r90 top
U9 "Xilinx CoolRunner-II XC2C64A" QFP10x10-G44/G10N 4685.04,3346.46 r0 top
U10 "SN75451BD" SO-G8/E2.5 7322.83,3917.32 r270 top

## Footprints (in the part's own frame and the unit in brackets; to place one, negate y for a bottom-side part, rotate by r counter-clockwise, add the part's x,y. Pads: shape width x height; smd on the part's side, far side on the other; paste and mask are expansions set on the pad)
0402 [mm] "Standard-sized 0402 Passive"
  rect 0.9x0.7 smd: 1(-0.65,0) 2(0.65,0)
  silkscreen extent -1.4,-0.25 -1.4,0.25
0603 [mm] "Standard-sized 0603 Passive"
  rect 1.1x1 smd: 1(-0.85,0) 2(0.85,0)
  silkscreen extent -1.7,-0.4 -1.7,0.4
1206 [mm] "Standard-sized 1206 Passive"
  rect 1.6x1.8 smd: 1(-1.4,0) 2(1.4,0)
  silkscreen extent -2.53,-0.65 -2.53,0.65
3216 [mm] "Standard-Sized 3216 Polarized Leadless Cap"
  rect 2x1.2 smd: 1(-1.4,0) 2(1.4,0)
  silkscreen extent -2.79,-0.9 1.7,0.9
7343 [mm] "Standard-Sized 7343 Polarized Leadless Cap"
  rect 2.6x2.4 smd: 1(-3.2,0) 2(3.2,0)
  silkscreen extent -5.32,-2.3 3.8,2.3
"AD PBGA-169" [mm] "BGA, Mini Plastic; 169 Balls; Body 19 x 19 mm; Pitch 1 mm"
  round 0.5 smd: A1(-8,8) A2(-7,8) A3(-6,8) A4(-5,8) A5(-4,8) A6(-3,8) A7(-2,8) A8(-1,8) A9(0,8) A10(1,8) A11(2,8) A12(3,8) A13(4,8) A14(5,8) A15(6,8) A16(7,8) A17(8,8) B1(-8,7) B2(-7,7) B3(-6,7) B4(-5,7) B5(-4,7) B6(-3,7) B7(-2,7) B8(-1,7) B9(0,7) B10(1,7) B11(2,7) B12(3,7) B13(4,7) B14(5,7) B15(6,7) B16(7,7) B17(8,7) C1(-8,6) C2(-7,6) C16(7,6) C17(8,6) D1(-8,5) D2(-7,5) D16(7,5) D17(8,5) E1(-8,4) E2(-7,4) E16(7,4) E17(8,4) F1(-8,3) F2(-7,3) F6(-3,3) F7(-2,3) F8(-1,3) F9(0,3) F10(1,3) F11(2,3) F12(3,3) F16(7,3) F17(8,3) G1(-8,2) G2(-7,2) G6(-3,2) G7(-2,2) G8(-1,2) G9(0,2) G10(1,2) G11(2,2) G12(3,2) G16(7,2) G17(8,2) H1(-8,1) H2(-7,1) H6(-3,1) H7(-2,1) H8(-1,1) H9(0,1) H10(1,1) H11(2,1) H12(3,1) H16(7,1) H17(8,1) J1(-8,0) J2(-7,0) J6(-3,0) J7(-2,0) J8(-1,0) J9(0,0) J10(1,0) J11(2,0) J12(3,0) J16(7,0) J17(8,0) K1(-8,-1) K2(-7,-1) K6(-3,-1) K7(-2,-1) K8(-1,-1) K9(0,-1) K10(1,-1) K11(2,-1) K12(3,-1) K16(7,-1) K17(8,-1) L1(-8,-2) L2(-7,-2) L6(-3,-2) L7(-2,-2) L8(-1,-2) L9(0,-2) L10(1,-2) L11(2,-2) L12(3,-2) L16(7,-2) L17(8,-2) M1(-8,-3) M2(-7,-3) M6(-3,-3) M7(-2,-3) M8(-1,-3) M9(0,-3) M10(1,-3) M11(2,-3) M12(3,-3) M16(7,-3) M17(8,-3) N1(-8,-4) N2(-7,-4) N16(7,-4) N17(8,-4) P1(-8,-5) P2(-7,-5) P16(7,-5) P17(8,-5) R1(-8,-6) R2(-7,-6) R16(7,-6) R17(8,-6) T1(-8,-7) T2(-7,-7) T3(-6,-7) T4(-5,-7) T5(-4,-7) T6(-3,-7) T7(-2,-7) T8(-1,-7) T9(0,-7) T10(1,-7) T11(2,-7) T12(3,-7) T13(4,-7) T14(5,-7) T15(6,-7) T16(7,-7) T17(8,-7) U1(-8,-8) U2(-7,-8) U3(-6,-8) U4(-5,-8) U5(-4,-8) U6(-3,-8) U7(-2,-8) U8(-1,-8) U9(0,-8) U10(1,-8) U11(2,-8) U12(3,-8) U13(4,-8) U14(5,-8) U15(6,-8) U16(7,-8) U17(8,-8)
  silkscreen extent -10.28,-9.5 9.5,9.5
ECS-3953M [mm] "ECS SMD CLOCK OSCILLATOR"
  rect 1.4x2 smd: 1(0,0) 2(5.08,0) 3(5.08,4.2) 4(0,4.2)
  silkscreen extent -2,-1.5 7.5,6
FIDUCIAL [mil] "Fiducial footprint as recommended by PCBpro"
  round 40 smd paste-20 mask+30: 0(0,0)
HDR2X3 [mm] "Connector; Header; 3x2 Position"
  rect 1.5x1.5 hole 0.9: 1(0,0)
  round 1.5 hole 0.9: 2(0,2.54) 3(2.54,0) 4(2.54,2.54) 5(5.08,0) 6(5.08,2.54)
  silkscreen extent -1.27,-1.27 6.35,3.81
HDR2X7 [mm] "Connector; Header; 7x2 Position"
  rect 1.5x1.5 hole 0.9: 1(0,0)
  round 1.5 hole 0.9: 2(0,2.54) 3(2.54,0) 4(2.54,2.54) 5(5.08,0) 6(5.08,2.54) 7(7.62,0) 8(7.62,2.54) 9(10.16,0) 10(10.16,2.54) 11(12.7,0) 12(12.7,2.54) 13(15.24,0) 14(15.24,2.54)
  silkscreen extent -1.27,-1.27 16.51,3.81
HPVL [mil]
  round 60 hole 40: 1(150,0) 2(50,0) 3(-50,0) 4(-150,0) 5(-150,-300) 8(150,-300)
  silkscreen extent -200,-370 200,100
LED0805 [mm] "Lite-ON 0805 LED package"
  rect 1.3x1.3 smd: 1(2.032,0) 2(0,0)
  silkscreen extent -1.02,-1.02 2.9,1.02
"MOLEX 87703-0001" [mm] "Molex 1.27mm pitch SATA device plug, 2.5\" drive, without jumper, 22 circuits"
  rect 3.66x4.4 smd: 0(-24.15,-4.8) 0(24.15,-4.8)
  round 1.524 hole 1.346: 0(-18.865,0) 0(18.865,0)
  rect 0.9x2.1 smd: 1(15.875,0) 2(14.605,0) 3(13.335,0) 4(12.065,0) 5(10.795,0) 6(9.525,0) 7(8.255,0) P1(1.905,0) P2(0.635,0) P3(-0.635,0) P4(-1.905,0) P5(-3.175,0) P6(-4.445,0) P7(-5.715,0) P8(-6.985,0) P9(-8.255,0) P10(-9.525,0) P11(-10.795,0) P12(-12.065,0) P13(-13.335,0) P14(-14.605,0) P15(-15.875,0)
  silkscreen extent -26.54,-6.98 26.54,2.54
QFP10x10-G44/G10N [mm] "QFP, Metric; 44 Leads; Body 10 x 10 mm; Pitch 0.8 mm"
  rect 1.9x0.5 smd: 1(-5.95,4) 2(-5.95,3.2) 3(-5.95,2.4) 4(-5.95,1.6) 5(-5.95,0.8) 6(-5.95,0) 7(-5.95,-0.8) 8(-5.95,-1.6) 9(-5.95,-2.4) 10(-5.95,-3.2) 11(-5.95,-4) 23(5.95,-4) 24(5.95,-3.2) 25(5.95,-2.4) 26(5.95,-1.6) 27(5.95,-0.8) 28(5.95,0) 29(5.95,0.8) 30(5.95,1.6) 31(5.95,2.4) 32(5.95,3.2) 33(5.95,4)
  rect 0.5x1.9 smd: 12(-4,-5.95) 13(-3.2,-5.95) 14(-2.4,-5.95) 15(-1.6,-5.95) 16(-0.8,-5.95) 17(0,-5.95) 18(0.8,-5.95) 19(1.6,-5.95) 20(2.4,-5.95) 21(3.2,-5.95) 22(4,-5.95) 34(4,5.95) 35(3.2,5.95) 36(2.4,5.95) 37(1.6,5.95) 38(0.8,5.95) 39(0,5.95) 40(-0.8,5.95) 41(-1.6,5.95) 42(-2.4,5.95) 43(-3.2,5.95) 44(-4,5.95)
  silkscreen extent -6.07,-4.6 4.6,4.92
RGY [mm] "TI RGY SMT part"
  oval 1x0.28 smd mask+0.07: 1(-2.4,-0.75) 10(2.4,-0.75) 11(2.4,0.75) 20(-2.4,0.75)
  oval 0.28x1 smd mask+0.07: 2(-1.75,-1.8) 3(-1.25,-1.8) 4(-0.75,-1.8) 5(-0.25,-1.8) 6(0.25,-1.8) 7(0.75,-1.8) 8(1.25,-1.8) 9(1.75,-1.8) 12(1.75,1.8) 13(1.25,1.8) 14(0.75,1.8) 15(0.25,1.8) 16(-0.25,1.8) 17(-0.75,1.8) 18(-1.25,1.8) 19(-1.75,1.8)
  silkscreen extent -3.05,-1.9 2.4,1.9
"SMT 2x7 2mm HDR" [mm] "SMT dual-row 14-pin SMT header with posts, like Molex 87832-1420"
  round 1.1 hole 1: 0(-5,0) 0(5,0)
  rect 1x2.75 smd: 1(6,2.125) 2(6,-2.125) 3(4,2.125) 4(4,-2.125) 5(2,2.125) 6(2,-2.125) 7(0,2.125) 8(0,-2.125) 9(-2,2.125) 10(-2,-2.125) 11(-4,2.125) 12(-4,-2.125) 13(-6,2.125) 14(-6,-2.125)
  silkscreen extent -8,-4 8,4
SO-G8/E2.5 [mm] "Small Outline, Plastic; 8 Leads; Body Width 3.9 mm"
  rect 0.6x2.05 smd: 1(-1.905,-2.675) 2(-0.635,-2.675) 3(0.635,-2.675) 4(1.905,-2.675) 5(1.905,2.675) 6(0.635,2.675) 7(-0.635,2.675) 8(-1.905,2.675)
  silkscreen extent -2.88,-2.8 2.5,1.25
SO-G54/X.5 [mm] "Small Outline, Plastic; 54 Leads; Body Width 10.16 mm"
  rect 0.5x1.5 smd: 1(-10.4,-5.55) 2(-9.6,-5.55) 3(-8.8,-5.55) 4(-8,-5.55) 5(-7.2,-5.55) 6(-6.4,-5.55) 7(-5.6,-5.55) 8(-4.8,-5.55) 9(-4,-5.55) 10(-3.2,-5.55) 11(-2.4,-5.55) 12(-1.6,-5.55) 13(-0.8,-5.55) 14(0,-5.55) 15(0.8,-5.55) 16(1.6,-5.55) 17(2.4,-5.55) 18(3.2,-5.55) 19(4,-5.55) 20(4.8,-5.55) 21(5.6,-5.55) 22(6.4,-5.55) 23(7.2,-5.55) 24(8,-5.55) 25(8.8,-5.55) 26(9.6,-5.55) 27(10.4,-5.55) 28(10.4,5.55) 29(9.6,5.55) 30(8.8,5.55) 31(8,5.55) 32(7.2,5.55) 33(6.4,5.55) 34(5.6,5.55) 35(4.8,5.55) 36(4,5.55) 37(3.2,5.55) 38(2.4,5.55) 39(1.6,5.55) 40(0.8,5.55) 41(0,5.55) 42(-0.8,5.55) 43(-1.6,5.55) 44(-2.4,5.55) 45(-3.2,5.55) 46(-4,5.55) 47(-4.8,5.55) 48(-5.6,5.55) 49(-6.4,5.55) 50(-7.2,5.55) 51(-8,5.55) 52(-8.8,5.55) 53(-9.6,5.55) 54(-10.4,5.55)
  silkscreen extent -11.34,-5.67 11.15,4.4
SOT223-5/Simple [mil] "SOT-223 without large heatsink"
  rect 30x60 smd: 1(-100,0) 2(-50,0) 3(0,0) 4(50,0) 5(100,0)
  rect 100x140 smd: 3(0,196.85)
  silkscreen extent -140,60 140,200
SSO-G28/E4.3 [mm] "SSOP; 28 Leads; Body Width 5.3 mm; Pitch 0.65 mm"
  rect 0.45x1.7 smd: 1(-4.225,-3.4) 2(-3.575,-3.4) 3(-2.925,-3.4) 4(-2.275,-3.4) 5(-1.625,-3.4) 6(-0.975,-3.4) 7(-0.325,-3.4) 8(0.325,-3.4) 9(0.975,-3.4) 10(1.625,-3.4) 11(2.275,-3.4) 12(2.925,-3.4) 13(3.575,-3.4) 14(4.225,-3.4) 15(4.225,3.4) 16(3.575,3.4) 17(2.925,3.4) 18(2.275,3.4) 19(1.625,3.4) 20(0.975,3.4) 21(0.325,3.4) 22(-0.325,3.4) 23(-0.975,3.4) 24(-1.625,3.4) 25(-2.275,3.4) 26(-2.925,3.4) 27(-3.575,3.4) 28(-4.225,3.4)
  silkscreen extent -5.18,-3.52 5.18,2.15
"TI EUS" [mil] "Package for TI PTH03000W"
  round 80 hole 60: 1(0,0) 2(0,-250) 3(0,-375) 4(625,-375) 5(620,0)
  silkscreen extent -100,-500 700,100
"XILINX FT256 BGA" [mm] "Xilinx BGA"
  round 0.45 smd mask+0.05: A1(-7.5,7.5) A2(-6.5,7.5) A3(-5.5,7.5) A4(-4.5,7.5) A5(-3.5,7.5) A6(-2.5,7.5) A7(-1.5,7.5) A8(-0.5,7.5) A9(0.5,7.5) A10(1.5,7.5) A11(2.5,7.5) A12(3.5,7.5) A13(4.5,7.5) A14(5.5,7.5) A15(6.5,7.5) A16(7.5,7.5) B1(-7.5,6.5) B2(-6.5,6.5) B3(-5.5,6.5) B4(-4.5,6.5) B5(-3.5,6.5) B6(-2.5,6.5) B7(-1.5,6.5) B8(-0.5,6.5) B9(0.5,6.5) B10(1.5,6.5) B11(2.5,6.5) B12(3.5,6.5) B13(4.5,6.5) B14(5.5,6.5) B15(6.5,6.5) B16(7.5,6.5) C1(-7.5,5.5) C2(-6.5,5.5) C3(-5.5,5.5) C4(-4.5,5.5) C5(-3.5,5.5) C6(-2.5,5.5) C7(-1.5,5.5) C8(-0.5,5.5) C9(0.5,5.5) C10(1.5,5.5) C11(2.5,5.5) C12(3.5,5.5) C13(4.5,5.5) C14(5.5,5.5) C15(6.5,5.5) C16(7.5,5.5) D1(-7.5,4.5) D2(-6.5,4.5) D3(-5.5,4.5) D4(-4.5,4.5) D5(-3.5,4.5) D6(-2.5,4.5) D7(-1.5,4.5) D8(-0.5,4.5) D9(0.5,4.5) D10(1.5,4.5) D11(2.5,4.5) D12(3.5,4.5) D13(4.5,4.5) D14(5.5,4.5) D15(6.5,4.5) D16(7.5,4.5) E1(-7.5,3.5) E2(-6.5,3.5) E3(-5.5,3.5) E4(-4.5,3.5) E5(-3.5,3.5) E6(-2.5,3.5) E7(-1.5,3.5) E8(-0.5,3.5) E9(0.5,3.5) E10(1.5,3.5) E11(2.5,3.5) E12(3.5,3.5) E13(4.5,3.5) E14(5.5,3.5) E15(6.5,3.5) E16(7.5,3.5) F1(-7.5,2.5) F2(-6.5,2.5) F3(-5.5,2.5) F4(-4.5,2.5) F5(-3.5,2.5) F6(-2.5,2.5) F7(-1.5,2.5) F8(-0.5,2.5) F9(0.5,2.5) F10(1.5,2.5) F11(2.5,2.5) F12(3.5,2.5) F13(4.5,2.5) F14(5.5,2.5) F15(6.5,2.5) F16(7.5,2.5) G1(-7.5,1.5) G2(-6.5,1.5) G3(-5.5,1.5) G4(-4.5,1.5) G5(-3.5,1.5) G6(-2.5,1.5) G7(-1.5,1.5) G8(-0.5,1.5) G9(0.5,1.5) G10(1.5,1.5) G11(2.5,1.5) G12(3.5,1.5) G13(4.5,1.5) G14(5.5,1.5) G15(6.5,1.5) G16(7.5,1.5) H1(-7.5,0.5) H2(-6.5,0.5) H3(-5.5,0.5) H4(-4.5,0.5) H5(-3.5,0.5) H6(-2.5,0.5) H7(-1.5,0.5) H8(-0.5,0.5) H9(0.5,0.5) H10(1.5,0.5) H11(2.5,0.5) H12(3.5,0.5) H13(4.5,0.5) H14(5.5,0.5) H15(6.5,0.5) H16(7.5,0.5) J1(-7.5,-0.5) J2(-6.5,-0.5) J3(-5.5,-0.5) J4(-4.5,-0.5) J5(-3.5,-0.5) J6(-2.5,-0.5) J7(-1.5,-0.5) J8(-0.5,-0.5) J9(0.5,-0.5) J10(1.5,-0.5) J11(2.5,-0.5) J12(3.5,-0.5) J13(4.5,-0.5) J14(5.5,-0.5) J15(6.5,-0.5) J16(7.5,-0.5) K1(-7.5,-1.5) K2(-6.5,-1.5) K3(-5.5,-1.5) K4(-4.5,-1.5) K5(-3.5,-1.5) K6(-2.5,-1.5) K7(-1.5,-1.5) K8(-0.5,-1.5) K9(0.5,-1.5) K10(1.5,-1.5) K11(2.5,-1.5) K12(3.5,-1.5) K13(4.5,-1.5) K14(5.5,-1.5) K15(6.5,-1.5) K16(7.5,-1.5) L1(-7.5,-2.5) L2(-6.5,-2.5) L3(-5.5,-2.5) L4(-4.5,-2.5) L5(-3.5,-2.5) L6(-2.5,-2.5) L7(-1.5,-2.5) L8(-0.5,-2.5) L9(0.5,-2.5) L10(1.5,-2.5) L11(2.5,-2.5) L12(3.5,-2.5) L13(4.5,-2.5) L14(5.5,-2.5) L15(6.5,-2.5) L16(7.5,-2.5) M1(-7.5,-3.5) M2(-6.5,-3.5) M3(-5.5,-3.5) M4(-4.5,-3.5) M5(-3.5,-3.5) M6(-2.5,-3.5) M7(-1.5,-3.5) M8(-0.5,-3.5) M9(0.5,-3.5) M10(1.5,-3.5) M11(2.5,-3.5) M12(3.5,-3.5) M13(4.5,-3.5) M14(5.5,-3.5) M15(6.5,-3.5) M16(7.5,-3.5) N1(-7.5,-4.5) N2(-6.5,-4.5) N3(-5.5,-4.5) N4(-4.5,-4.5) N5(-3.5,-4.5) N6(-2.5,-4.5) N7(-1.5,-4.5) N8(-0.5,-4.5) N9(0.5,-4.5) N10(1.5,-4.5) N11(2.5,-4.5) N12(3.5,-4.5) N13(4.5,-4.5) N14(5.5,-4.5) N15(6.5,-4.5) N16(7.5,-4.5) P1(-7.5,-5.5) P2(-6.5,-5.5) P3(-5.5,-5.5) P4(-4.5,-5.5) P5(-3.5,-5.5) P6(-2.5,-5.5) P7(-1.5,-5.5) P8(-0.5,-5.5) P9(0.5,-5.5) P10(1.5,-5.5) P11(2.5,-5.5) P12(3.5,-5.5) P13(4.5,-5.5) P14(5.5,-5.5) P15(6.5,-5.5) P16(7.5,-5.5) R1(-7.5,-6.5) R2(-6.5,-6.5) R3(-5.5,-6.5) R4(-4.5,-6.5) R5(-3.5,-6.5) R6(-2.5,-6.5) R7(-1.5,-6.5) R8(-0.5,-6.5) R9(0.5,-6.5) R10(1.5,-6.5) R11(2.5,-6.5) R12(3.5,-6.5) R13(4.5,-6.5) R14(5.5,-6.5) R15(6.5,-6.5) R16(7.5,-6.5) T1(-7.5,-7.5) T2(-6.5,-7.5) T3(-5.5,-7.5) T4(-4.5,-7.5) T5(-3.5,-7.5) T6(-2.5,-7.5) T7(-1.5,-7.5) T8(-0.5,-7.5) T9(0.5,-7.5) T10(1.5,-7.5) T11(2.5,-7.5) T12(3.5,-7.5) T13(4.5,-7.5) T14(5.5,-7.5) T15(6.5,-7.5) T16(7.5,-7.5)
  silkscreen extent -9.27,-8.5 8.5,8.5

## Part data
C1.A C1.B C1.C C1.D C2.A C2.B C2.C C2.D C3.A C3.B C3.C C3.D C4.A C4.B C4.C C4.D C5.A C5.B C5.C C5.D C6.A C6.B C6.C C6.D C7 C9.A C9.B C9.C C9.D C10.A C10.B C10.C C12.A C12.B C12.C C12.D C13 C14 C15 C21 C27 C28 C29 C33 C34 C35 C36 C42 C43 C44 C45 C46 C47 C48 C50 C51 C52 C53 C57 C58 C59.A C59.B C59.C C59.D C60.A C60.B C60.C C60.D C61.A C61.B C61.C C61.D C62.A C62.B C62.C C62.D: library part Cap, "Capacitor"
C8: library part POLCAP2, "Standard Capacitor"
C10.D C11 C64: "Standard Capacitor"
C16 C63: "Capacitor"
C17 C18 C19 C20: library part "Cap Pol3", "Tantalum Bypass cap"
C22 C23 C24 C25: library part POLCAP, "Standard Capacitor"
C26: library part "Cap Pol1", "Polarized Capacitor (Radial)"
C56: library part Cap2, "Capacitor"
DS1.A DS1.B DS1.C DS1.D DS2 DS3 DS4 DS5 DS6: "Typical BLUE SiC LED"
FID1 FID2 FID3: library part FIDUCIAL, "Fiducial"
IO1: library part SATA-23
JP1 P2: "Header, 7-Pin, Dual row"
O1: "ECS SMD Oscillator, ECS-3953M"
O2 O4: "Low-cost fiber transmitter"
O3 O5: "Low-cost fiber receiver"
P1.A P1.B P1.C P1.D: library part "Header 3", "Header, 3-Pin"
R1.A R1.B R1.C R1.D R2.A R2.B R2.C R2.D R3.A R3.B R3.C R3.D R4.A R4.B R4.C R4.D R5.A R5.B R5.C R5.D R6.A R6.B R6.C R6.D R7.A R7.B R7.C R7.D R8 R9 R10 R11 R12 R13 R14 R15 R16 R18 R19 R20 R22 R23 R24 R25 R26 R27 R28 R29 R30 R31 R32 R33 R34.A R34.B R34.C R34.D R35: library part Res1, "Resistor"
U1.A U1.B U1.C U1.D: library part ADSP-BF53x-PBGA169, "Analog Devices Blackfin"
U2.A U2.B U2.C U2.D: library part MT48LC16M16A2TG, "Micron 16Mbitx16 SDRAM"
U3: library part XC3S200-FT256, "Xilinx Spartan-3 FPGA"
U4: library part SN54LVC07A
U5: "30-66 MHz 10-Bit Bus LVDS Deserializer"
U6: library part PTH03000
U7 U8: library part TPS795XX, "TI Ultra-low-noise LDO"
U9: library part XC2C64A-5VQ44C
U10: "Dual Peripheral Driver"

## Free pads (board coordinates)
  round 173.23 hole 149.61: 4(2250,3250) 4(2250,5750) 4(8000,3250) 4(8000,5750)

## Via types
v1: diameter 24, hole 10, Top Layer to Bottom Layer, tented top, 281 vias
v2: diameter 24, hole 10, Top Layer to Bottom Layer, 250 vias
v3: diameter 20, hole 10, Top Layer to Bottom Layer, 211 vias
v4: diameter 21.2, hole 10, Top Layer to Bottom Layer, tented top, 109 vias
v5: diameter 20, hole 10, Top Layer to Bottom Layer, tented top, 96 vias
v6: diameter 40, hole 20, Top Layer to Bottom Layer, 25 vias
v7: diameter 25, hole 15, Top Layer to Bottom Layer, 9 vias
v8: diameter 35, hole 20, Top Layer to Bottom Layer, 8 vias
v9: diameter 40, hole 25, Top Layer to Bottom Layer, 8 vias

## Nets (pads, with @x,y where several pads share a name; then routed paths per layer and width w, separated by ;. In a path a pad name is that pad's centre, name@x,y a point inside that pad or via, vN(x,y) a via of type N, cw(c..) or ccw(c..) an arc to the next point about the centre after c; other vN are vias at no path point)
+1.2VCC: C1.A.2 C1.B.2 C1.C.2 C1.D.2 C2.A.2 C2.B.2 C2.C.2 C2.D.2 C3.A.2 C3.B.2 C3.C.2 C3.D.2 C4.A.2 C4.B.2 C4.C.2 C4.D.2 C22.1 C23.1 C24.1 C25.1 C42.2 C43.2 C44.2 C45.2 U1.A.F12 U1.A.G12 U1.A.H12 U1.A.J12 U1.A.K12 U1.A.L12 U1.A.M10 U1.A.M11 U1.A.M12 U1.B.F12 U1.B.G12 U1.B.H12 U1.B.J12 U1.B.K12 U1.B.L12 U1.B.M10 U1.B.M11 U1.B.M12 U1.C.F12 U1.C.G12 U1.C.H12 U1.C.J12 U1.C.K12 U1.C.L12 U1.C.M10 U1.C.M11 U1.C.M12 U1.D.F12 U1.D.G12 U1.D.H12 U1.D.J12 U1.D.K12 U1.D.L12 U1.D.M10 U1.D.M11 U1.D.M12 U3.D4 U3.D13 U3.E5 U3.E12 U3.M5 U3.M12 U3.N4 U3.N13 U6.5 | length 3002.2
  Top Layer w7: v1@3106.3,4685.04 v1(3118.11,4685.04) ; v1(3118.11,4645.67) U1.A.G12@3149.61,4645.67 ; v1(3122.05,4606.3) U1.A.F12@3149.61,4606.3 ; U1.A.K12@3145.67,4763.78 U1.A.K12@3149.61,4763.78 v1(3125.98,4787.4) 3141.73,4803.15 U1.A.L12@3149.61,4803.15 ; U1.A.H12@3149.61,4685.04 v1(3118.11,4685.04) ; U1.A.J12@3149.61,4724.41 3125.98,4724.41 3118.11,4716.54 v1(3118.11,4685.04) ; U1.A.M12@3149.61,4842.52 v1(3149.61,4870.08) ; U1.A.M11@3188.98,4842.52 v1(3188.98,4874.02) ; U1.A.M10@3228.35,4842.52 v1(3228.35,4874.02) ; v4(3435.04,3582.68) U3.N4@3454.72,3602.36 ; v4(3435.04,3937.01) U3.D4@3454.72,3956.69 ; v4(3474.41,3622.05) U3.M5@3494.09,3641.73 ; v4(3474.41,3937.01) U3.E5@3494.09,3917.32 ; v4(3750,3897.64) U3.E12@3769.69,3917.32 U3.D13@3809.06,3956.69 ; U3.M12@3769.69,3641.73 v4(3789.37,3622.05) ; U3.N13@3809.06,3602.36 v4(3828.74,3582.68) ; v1@4318.9,4685.04 v1(4330.71,4685.04) ; v1(4330.71,4645.67) U1.B.G12@4362.2,4645.67 ; v1(4334.65,4606.3) U1.B.F12@4362.2,4606.3 ; U1.B.K12@4358.27,4763.78 U1.B.K12@4362.2,4763.78 v1(4338.58,4787.4) 4354.33,4803.15 U1.B.L12@4362.2,4803.15 ; U1.B.H12@4362.2,4685.04 v1(4330.71,4685.04) ; U1.B.J12@4362.2,4724.41 4338.58,4724.41 4330.71,4716.54 v1(4330.71,4685.04) ; U1.B.M12@4362.2,4842.52 v1(4362.2,4870.08) ; U1.B.M11@4401.57,4842.52 v1(4401.57,4874.02) ; U1.B.M10@4440.94,4842.52 v1(4440.94,4874.02) ; v1@5531.5,4685.04 v1(5543.31,4685.04) ; v1(5543.31,4645.67) U1.C.G12@5574.8,4645.67 ; v1(5547.24,4606.3) U1.C.F12@5574.8,4606.3 ; U1.C.K12@5570.87,4763.78 U1.C.K12@5574.8,4763.78 v1(5551.18,4787.4) 5566.93,4803.15 U1.C.L12@5574.8,4803.15 ; U1.C.H12@5574.8,4685.04 v1(5543.31,4685.04) ; U1.C.J12@5574.8,4724.41 5551.18,4724.41 5543.31,4716.54 v1(5543.31,4685.04) ; U1.C.M12@5574.8,4842.52 v1(5574.8,4870.08) ; U1.C.M11@5614.17,4842.52 v1(5614.17,4874.02) ; U1.C.M10@5653.54,4842.52 v1(5653.54,4874.02) ; v1@6744.09,4685.04 v1(6755.91,4685.04) ; v1(6755.91,4645.67) U1.D.G12@6787.4,4645.67 ; v1(6759.84,4606.3) U1.D.F12@6787.4,4606.3 ; U1.D.K12@6783.47,4763.78 U1.D.K12@6787.4,4763.78 v1(6763.78,4787.4) 6779.53,4803.15 U1.D.L12@6787.4,4803.15 ; U1.D.H12@6787.4,4685.04 v1(6755.91,4685.04) ; U1.D.J12@6787.4,4724.41 6763.78,4724.41 6755.91,4716.54 v1(6755.91,4685.04) ; U1.D.M12@6787.4,4842.52 v1(6787.4,4870.08) ; U1.D.M11@6826.77,4842.52 v1(6826.77,4874.02) ; U1.D.M10@6866.14,4842.52 v1(6866.14,4874.02)
  Top Layer w12: v7(3770.67,4404.53) C22.1@3770.67,4464.57 ; v7(4976.38,4423.23) C23.1@4976.38,4468.5 ; C24.1@6177.17,4452.76 v7(6177.17,4498.03) ; v7(6178.15,4401.57) C24.1@6178.15,4452.76 ; C25.1@7334.65,4181.1 7334.65,4201.77 v7(7364.17,4231.3)
  Mid-Layer 1 w7: v1@3106.3,4685.04 v1(3118.11,4685.04) ; v1@4318.9,4685.04 v1(4330.71,4685.04) ; v1@5531.5,4685.04 v1(5543.31,4685.04) ; v1@6744.09,4685.04 v1(6755.91,4685.04)
  Bottom Layer w7: C4.A.2@3078.68,4714.57 3088.58,4714.57 v1(3118.11,4685.04) ; C2.A.2@3116.08,4566.93 3116.08,4600.33 v1(3122.05,4606.3) ; v1(3125.98,4787.4) 3131.95,4793.37 C3.A.2@3131.95,4822.83 ; v1(3188.98,4874.02) 3188.98,4905.51 C1.A.2@3204.72,4921.26 3204.72,4897.64 v1(3228.35,4874.02) ; C4.B.2@4291.28,4714.57 4301.18,4714.57 v1(4330.71,4685.04) ; C2.B.2@4328.68,4566.93 4328.68,4600.33 v1(4334.65,4606.3) ; v1(4338.58,4787.4) 4344.55,4793.37 C3.B.2@4344.55,4822.83 ; v1(4401.57,4874.02) 4401.57,4905.51 C1.B.2@4417.32,4921.26 4417.32,4897.64 v1(4440.94,4874.02) ; C4.C.2@5503.87,4714.57 5513.78,4714.57 v1(5543.31,4685.04) ; C2.C.2@5541.28,4566.93 5541.28,4600.33 v1(5547.24,4606.3) ; v1(5551.18,4787.4) 5557.15,4793.37 C3.C.2@5557.15,4822.83 ; v1(5614.17,4874.02) 5614.17,4905.51 C1.C.2@5629.92,4921.26 5629.92,4897.64 v1(5653.54,4874.02) ; C4.D.2@6716.47,4714.57 6726.38,4714.57 v1(6755.91,4685.04) ; C2.D.2@6753.87,4566.93 6753.87,4600.33 v1(6759.84,4606.3) ; v1(6763.78,4787.4) 6769.75,4793.37 C3.D.2@6769.75,4822.83 ; v1(6826.77,4874.02) 6826.77,4905.51 C1.D.2@6842.52,4921.26 6842.52,4897.64 v1(6866.14,4874.02)
  Bottom Layer w12: v4(3435.04,3582.68) C42.2@3435.04,3600.39 ; C42.2@3438.98,3616.14 3442.91,3620.08 v4@3478.35,3620.08 ; v4(3474.41,3937.01) C43.2@3505.91,3937.01 ; C44.2@3720.47,3897.64 v4(3750,3897.64) ; C45.2@3789.37,3568.9 3814.96,3568.9 v4(3828.74,3582.68)
  other v4: 3789.37,3937.01
+1.8VCC: C8.1 C16.2 U7.4 U9.15 | length 355.4
  Top Layer w10: U9.15@4622.05,3112.2 v3(4622.05,3177.17)
  Top Layer w20: v6(5731.3,3153.54) 5754.92,3177.17 C16.2@5754.92,3215.55 ; C8.1@6066.93,3200.79 v6(6157.48,3200.79) 6157.48,3221.46 6189.17,3253.15 U7.4@6232.28,3253.15
  Mid-Layer 1 w20: v6(6157.48,3200.79) v6@6171.26,3214.57
+2.5VCC: C27.1 C46.2 C47.2 C48.2 C50.2 C51.2 C52.2 C53.2 C63.2 U3.A6 U3.A11 U3.F1 U3.F16 U3.J5 U3.J6 U3.K6 U3.L1 U3.L16 U3.T6 U3.T11 U8.4 | length 1050.2
  Top Layer w7: v4(3309.06,3681.1) U3.L1@3336.61,3681.1 ; v4(3309.06,3877.95) U3.F1@3336.61,3877.95 ; v4@3476.38,3740.16 U3.J5@3496.06,3759.84 ; v4(3513.78,3740.16) U3.J6@3533.46,3759.84 ; v4@3515.75,3700.79 U3.K6@3535.43,3720.47 ; v4(3533.46,3458.66) U3.T6@3533.46,3484.25 ; U3.A6@3533.46,4074.8 v5(3533.46,4102.36) ; v3(3730.32,3423.23) U3.T11@3730.32,3484.25 ; U3.A11@3730.32,4074.8 3730.32,4090.55 v5(3746.06,4106.3) ; U3.L16@3927.17,3681.1 3946.85,3700.79 v5(3970.47,3700.79) ; U3.F16@3927.17,3877.95 v3(3982.28,3877.95)
  Top Layer w20: U8.4@2700.79,3278.35 v6(2762.6,3278.35) 2826.77,3342.52 C27.1@2842.52,3342.52 ; C27.1@2874.02,3342.52 v6@2874.02,3425.2 ; v6(3139.76,3230.32) C63.2@3203.74,3230.32
  Bottom Layer w7: v3(3730.32,3423.23) 3732.28,3425.2 C52.2@3732.28,3456.69
  Bottom Layer w12: v4(3309.06,3681.1) 3338.58,3710.63 C47.2@3370.08,3710.63 ; C48.2@3450.79,3779.53 3450.79,3765.75 v4@3476.38,3740.16 ; 3525.94,3690.59 C53.2@3545,3690.59 ; v4(3533.46,3458.66) 3561.02,3458.66 C46.2@3576.77,3474.41 ; v5@3533.46,4100.39 v5(3533.46,4102.36) ; C50.2@3920,3840.59 C50.2@3921.26,3838.58 ; C51.2@3945,3690.59 3960.28,3690.59 v5(3970.47,3700.79)
  Bottom Layer w25: C50.2@3921.26,3838.58 3942.91,3838.58 v3(3982.28,3877.95)
  other v4: 3513.78,3700.79 3474.41,3740.16
  other v6: 2874.02,3418.31
+5VCC: C56.1 C57.1 IO1.P7 IO1.P8 IO1.P9 R22.2 R23.2 R25.1 R26.2 R27.2 R29.1 U10.1 U10.6 U10.8 | length 932
  Top Layer w7: IO1.P7@2297.24,4725 2360.83,4725 2372.05,4736.22 v3(2372.05,4777.56) ; U10.1@7217.52,3992.32 v3(7277.36,3992.32)
  Top Layer w16: IO1.P8@2297.24,4777.56 v3(2372.05,4777.56) ; IO1.P9@2297.24,4825 v3(2371.85,4825) ; C56.1@7066.93,3966.54 7092.52,3992.13 U10.1@7216.54,3992.13 ; U10.6@7427.17,3891.73 v3(7486.22,3891.73) ; U10.8@7428.15,3992.32 v3(7428.15,4028.54) ; R23.2@7604.33,5200.79 R22.2@7604.33,5281.5 ; v3(7608.27,3618.11) R29.1@7608.27,3657.48 ; v3(7608.27,4234.25) R26.2@7608.27,4277.56 ; R27.2@7612.2,4183.07 v3@7612.2,4230.31 ; v3(7618.11,4639.76) R25.1@7618.11,4681.1
  Bottom Layer w7: C57.1@7405.57,3858.27 7452.76,3858.27 v3(7486.22,3891.73)
  other v3: 7153.54,3992.13 7604.33,5240.16
DSP0RX+: IO1.6 U3.J1 | length 1190.6
  Top Layer w7: 3309.06,3759.84 U3.J1@3336.61,3759.84
  Top Layer w9: IO1.6@2297.24,4125 2342.52,4125 2363.19,4104.33 2940.94,4104.33 3285.43,3759.84 3309.06,3759.84
DSP0RX-: IO1.5 U3.J2 | length 1225.6
  Top Layer w7: 3309.06,3740.16 3356.3,3740.16 U3.J2@3375.98,3759.84
  Top Layer w9: IO1.5@2297.24,4075 2930.91,4075 3265.75,3740.16 3309.06,3740.16
DSP0TX+: IO1.2 R8.2 R9.2 U5.5 | length 547
  Top Layer w7: IO1.2@2287.2,3925 IO1.2@2297.24,3925 ; R8.2@2549.21,3677.17 R9.2@2549.21,3744.09 ; R9.2@2549.21,3751.97 2588.58,3751.97 2610.24,3773.62 U5.5@2681.1,3773.62
  Top Layer w9: IO1.2@2293.31,3925 2368.31,3925 2545.28,3748.03 R9.2@2549.21,3748.03
DSP0TX-: IO1.3 R9.1 R10.2 U5.6 | length 550.4
  Top Layer w7: R9.1@2545.28,3793.31 v3(2580.71,3793.31) ; R9.1@2549.21,3795.28 R10.2@2549.21,3862.2 ; v3(2625,3749.02) U5.6@2681.1,3749.02
  Top Layer w9: IO1.3@2293.31,3972.44 2372.05,3972.44 R9.1@2549.21,3795.28
  Mid-Layer 1 w7: v3(2580.71,3793.31) v3(2625,3749.02)
DSPA_CLK: U1.A.A14 U3.C1 | length 537.3
  Top Layer w7: U1.A.A14@3070.87,4409.45 3149.61,4330.71 3149.61,4159.45 3236.22,4072.83 3259.84,4072.83 U3.C1@3336.61,3996.06
DSPA_DR0PRI: U1.A.M2 U3.F2 | length 1071.2
  Top Layer w7: U3.F2@3375.98,3877.95 v4(3395.67,3897.64) ; U1.A.M2@3539.37,4844.49 3541.34,4844.49 v5(3562.99,4822.83)
  Bottom Layer w6: 3375.98,4061.02 3375.98,3917.32 v4(3395.67,3897.64)
  Bottom Layer w7: 3375.98,4061.02 3562.99,4248.03 v5(3562.99,4822.83)
DSPA_DR1PRI: U1.A.H1 U3.D2 | length 871.8
  Top Layer w6: v5(3356.3,3977.36) 3375.98,3957.68 U3.D2@3375.98,3956.69 ; v5(3517.72,4665.35) 3562.99,4665.35 U1.A.H1@3582.68,4685.04
  Mid-Layer 2 w6: v5(3356.3,3977.36) 3356.3,3976.38 3375.87,3995.95 3375.87,4054.02 3419.29,4097.44 3419.29,4123.03 3488.19,4191.93 3488.19,4442.91 3472.44,4458.66 3472.44,4559.06 3495.08,4581.69 3495.08,4642.72 v5(3517.72,4665.35)
DSPA_DT1PRI: U1.A.F1 U3.E1 | length 1028.9
  Top Layer w6: v5(3298.23,3907.48) 3308.07,3917.32 U3.E1@3336.61,3917.32 ; v5(3519.69,4617.13) 3528.54,4625.98 3562.99,4625.98 U1.A.F1@3582.68,4606.3
  Mid-Layer 1 w7: v5(3298.23,3907.48) 3275.59,3907.48 3181.1,4001.97 3181.1,4223.43 3451.77,4494.09 3451.77,4549.21 v5(3519.69,4617.13)
DSPA_DTOPRI: U1.A.K2 U3.D1 | length 959.8
  Top Layer w7: v4(3305.12,3968.5) 3316.93,3956.69 U3.D1@3336.61,3956.69 ; v5(3476.38,4649.61) 3472.44,4653.54 3472.44,4716.54 3519.68,4763.78 U1.A.K2@3543.31,4763.78
  Mid-Layer 2 w7: v4(3305.12,3968.5) 3305.12,4043.31 3472.44,4210.63 3472.44,4427.17 3457.47,4442.13 3457.47,4575.58 3476.38,4594.49 v5(3476.38,4649.61)
DSPA_FLAG0: U1.A.C1 U3.C7 | length 536
  Top Layer w7: v4(3553.15,4015.75) U3.C7@3572.83,3996.06 ; U1.A.C1@3582.68,4488.19 3586.61,4488.19 v5(3608.27,4466.54)
  Mid-Layer 2 w7: v4(3553.15,4015.75) 3572.83,4035.43 3572.83,4431.1 v5(3608.27,4466.54)
DSPA_FLAG1: U1.A.B1 U3.B8 | length 441.9
  Top Layer w7: U1.A.B1@3582.68,4448.82 3608.27,4423.23 3608.27,4324.8 3631.89,4301.18 3631.89,4055.12 U3.B8@3612.2,4035.43
DSPA_FLAG4: U1.A.A1 U3.A8 | length 346.9
  Top Layer w7: U1.A.A1@3582.68,4409.45 3582.68,4311.02 3612.2,4281.5 U3.A8@3612.2,4074.8
DSPA_FS1: U1.A.P2 U3.D5 | length 1129.4
  Top Layer w6: U3.D5@3494.09,3956.69 v5(3513.78,3976.38) ; U1.A.P2@3543.31,4921.26 3562.99,4901.57 3599.41,4901.57 v5(3625,4875.98)
  Bottom Layer w6: v5(3513.78,3976.38) 3494.09,3996.06 3494.09,4090.55 3672.24,4268.7 3672.24,4800.2 3625,4847.44 v5(3625,4875.98)
DSPA_MISO: R1.A.1 U1.A.E2 U3.C3 | length 857.7
  Top Layer w7: U3.C3@3415.35,3996.06 v4(3435.04,4015.75) ; v5(3509.84,4527.56) 3509.84,4543.31 3533.46,4566.93 U1.A.E2@3543.31,4566.93 3562.99,4586.61 3708.66,4586.61 R1.A.1@3732.28,4610.24
  Mid-Layer 2 w7: v4(3435.04,4015.75) 3488.02,4068.73 3506.67,4087.38 3506.67,4136.59 3535.43,4165.35 3535.43,4486.22
  Mid-Layer 2 w8: v5(3509.84,4527.56) 3535.43,4501.97 3535.43,4486.22
DSPA_MOSI: U1.A.E1 U3.C2 | length 787.6
  Top Layer w7: U3.C2@3374.02,3996.06 v4@3395.67,4017.72 ; U1.A.E1@3582.68,4566.93 v5(3622.05,4566.93)
  Mid-Layer 2 w7: v4@3395.67,4017.72 3484.25,4106.3 3484.25,4153.54 3503.94,4173.23 3503.94,4452.76 3486.22,4470.47 3486.22,4533.46 3519.68,4566.93 v5(3622.05,4566.93)
  other v4: 3395.67,4015.75
DSPA_RESET: R34.A.1 U1.A.A12 U3.B1 | length 728.4
  Top Layer w7: R34.A.1@3145.67,4037.4 v3(3145.67,4120.08) ; U1.A.A12@3149.61,4409.45 3181.1,4377.95 3181.1,4163.39 3248.03,4096.46 3275.59,4096.46 U3.B1@3336.61,4035.43
  Mid-Layer 1 w7: v3(3145.67,4120.08) 3145.67,4248.03 v3(3181.1,4283.46)
DSPA_RFS0: U1.A.N1 U3.G2 | length 1205.1
  Top Layer w7: v4(3356.3,3858.27) U3.G2@3375.98,3838.58 ; v5(3515.75,4826.77) 3515.75,4850.39 3527.56,4862.2 3562.99,4862.2 U1.A.N1@3582.68,4881.89
  Bottom Layer w6: 3336.61,4072.83 3336.61,3956.69 3356.3,3937.01 v4(3356.3,3858.27)
  Bottom Layer w7: 3336.61,4072.83 3543.31,4279.53 3543.31,4799.21 v5(3515.75,4826.77)
DSPA_RFS1: U1.A.J1 U3.D3 | length 901.1
  Top Layer w6: U3.D3@3415.35,3956.69 v5(3435.04,3976.38) ; U1.A.J1@3582.68,4724.41 v5(3616.14,4690.94)
  Bottom Layer w6: v5(3435.04,3976.38) 3454.72,3996.06 3454.72,4074.8 3655.51,4275.59 3655.51,4652.56 v5@3614.17,4693.9
DSPA_SCK: U1.A.D1 U3.C8 | length 599.7
  Top Layer w7: U1.A.D1@3582.68,4527.56 3614.17,4527.56 v5(3633.86,4507.87) ; v4(3592.52,4015.75) U3.C8@3612.2,3996.06
  Mid-Layer 2 w6: v4(3592.52,4015.75) 3592.52,4289.37
  Mid-Layer 2 w7: 3592.52,4289.37 3592.52,4413.39 3637.8,4458.66
  Mid-Layer 2 w8: v5(3633.86,4507.87) 3637.8,4503.94 3637.8,4458.66
DSPA_SCLK: U1.A.G1 U1.A.J2 U1.A.L2 U1.A.N2 U3.F3 | length 1401.5
  Top Layer w6: U3.F3@3415.35,3877.95 v5(3435.04,3897.64) ; v5(3507.87,4793.31) 3517.72,4803.15 U1.A.L2@3543.31,4803.15 ; v5(3509.84,4882.87) U1.A.N2@3543.31,4882.87 ; v5(3513.78,4724.41) U1.A.J2@3543.31,4724.41 ; U1.A.G1@3582.68,4645.67 v5(3619.09,4645.67)
  Mid-Layer 2 w6: v5(3507.87,4793.31) 3507.87,4756.89 v5(3619.09,4645.67) ; v5(3509.84,4882.87) 3542.32,4850.39 3542.32,4722.44 ; v5(3513.78,4724.41) 3540.35,4724.41
  Bottom Layer w6: v5(3435.04,3897.64) 3415.35,3917.32 3415.35,4060.04 3586.61,4231.3 3586.61,4613.19 v5(3619.09,4645.67)
DSPA_SS: R7.A.2 U1.A.D2 U3.C6 | length 949.1
  Top Layer w7: v4(3513.78,4015.75) U3.C6@3533.46,3996.06 ; U1.A.D2@3543.31,4527.56 3562.99,4547.24 3767.72,4547.24 3799.21,4578.74 R7.A.2@3799.21,4612.2 ; v5(3633.86,4537.4) 3643.7,4547.24
  Mid-Layer 2 w7: v4(3513.78,4015.75) 3553.15,4055.12 3553.15,4500 3590.55,4537.4 v5(3633.86,4537.4)
DSPA_TFS0: U1.A.L1 U3.E2 | length 1182.6
  Top Layer w7: v5(3279.53,3937.01) 3354.33,3937.01 U3.E2@3375.98,3915.35 ; U1.A.L1@3582.68,4803.15 3584.65,4803.15 v5(3606.3,4781.5)
  Mid-Layer 1 w7: v5@3277.56,3935.04 v5(3279.53,3937.01) 3204.72,4011.81 3204.72,4216.54 3452.02,4463.83 3452.02,4465.8 3478.35,4492.13 3478.35,4539.37 3545.66,4606.68 3562.01,4623.03 3562.01,4737.2 v5(3606.3,4781.5)